# EAGLE board Qwiic_VEML7700-Panel (EAGLE 9.6.2), part 1 of 3
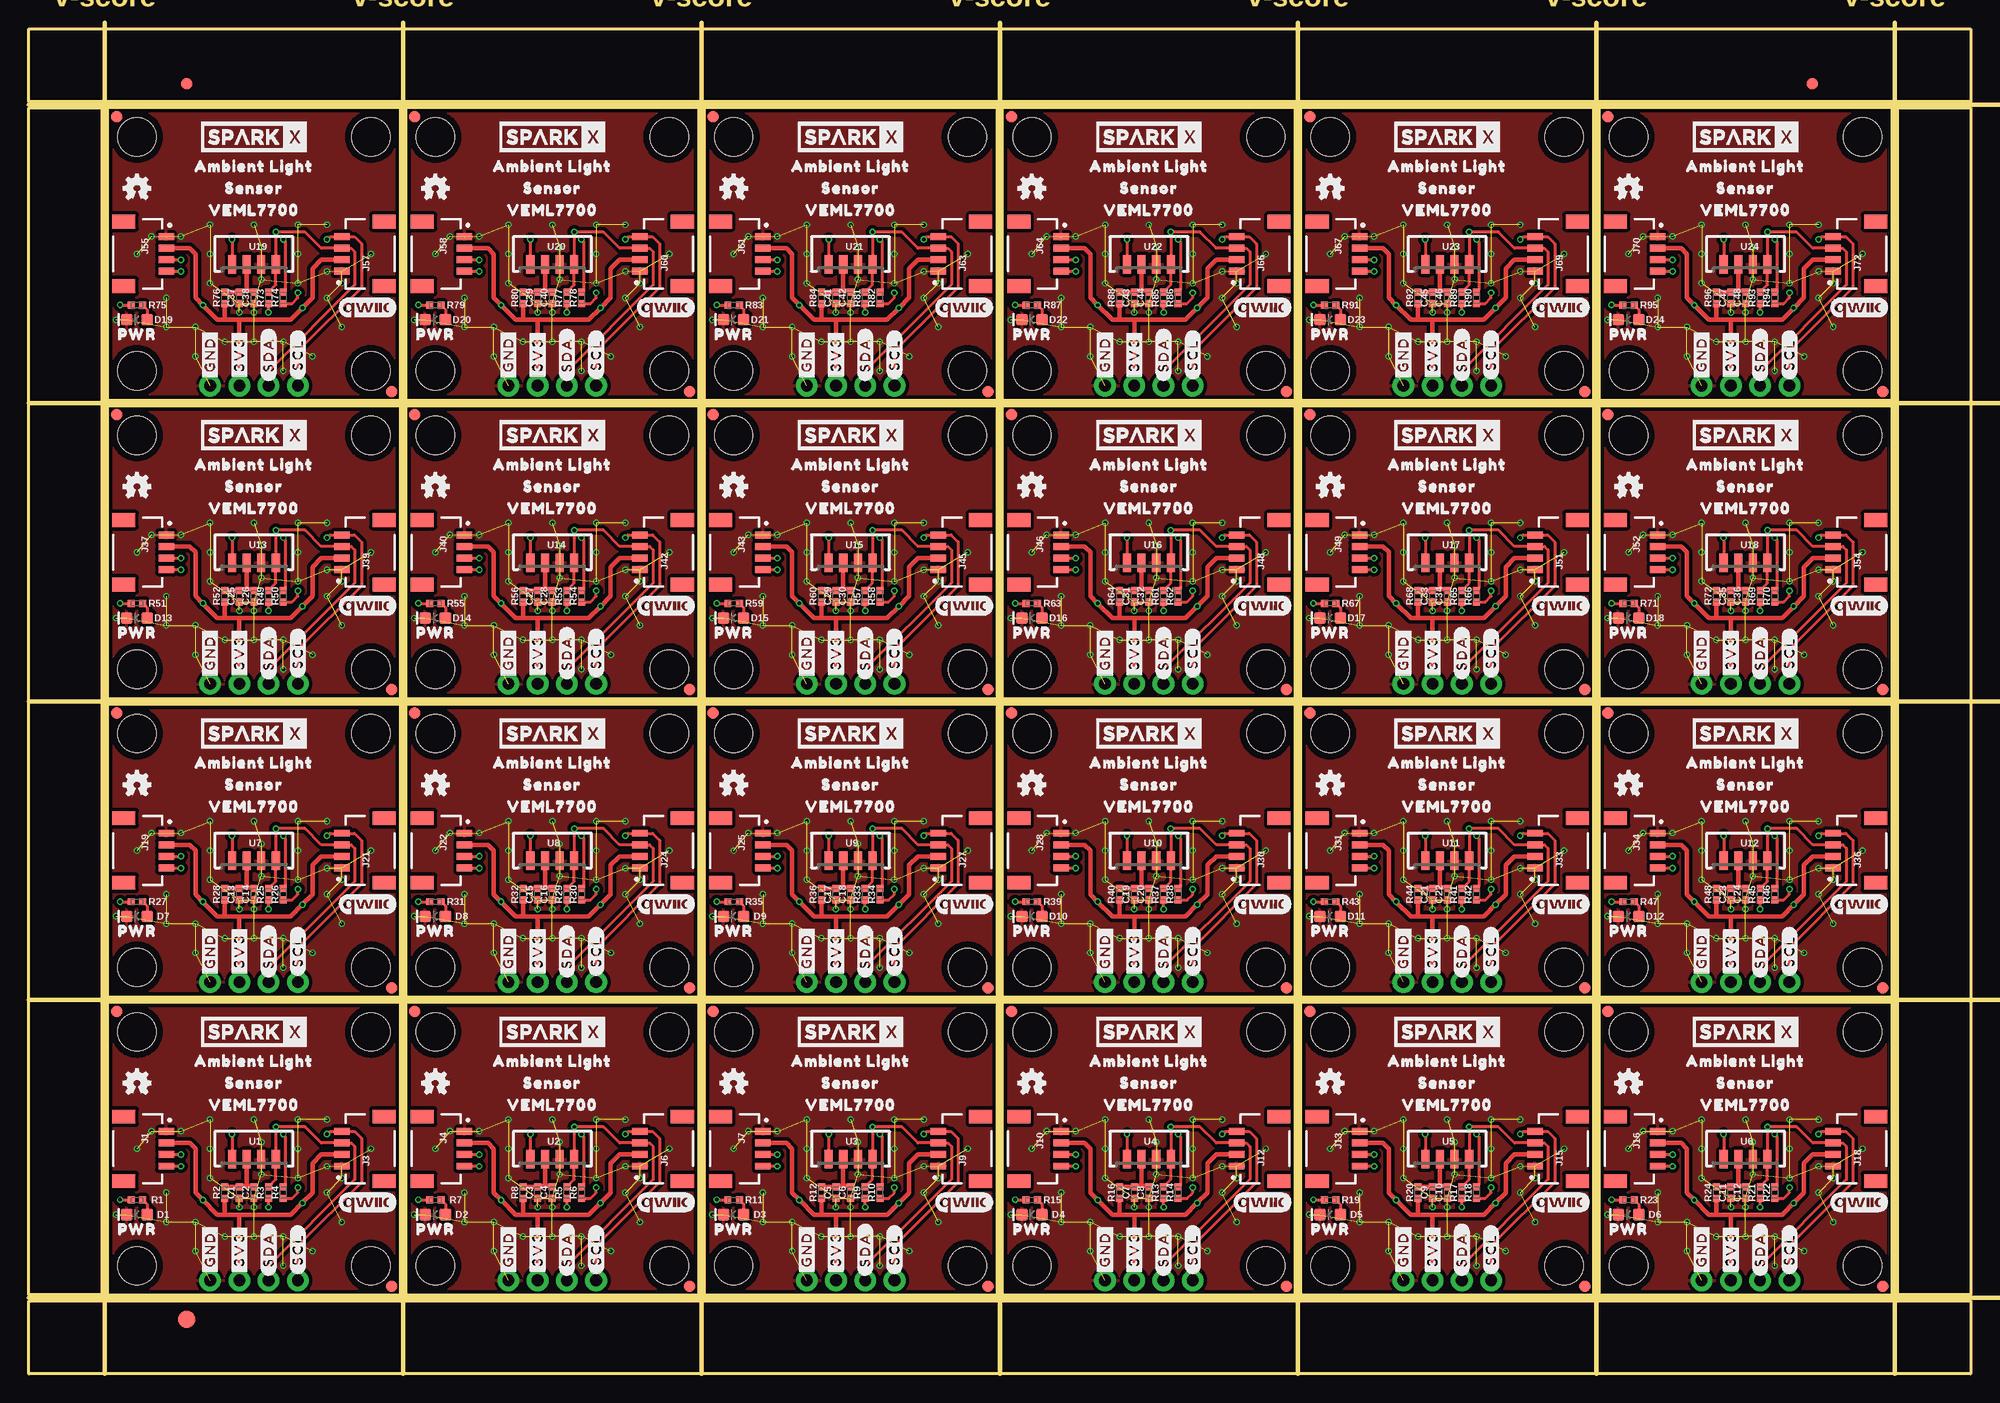
[diagram p0: board, top side]
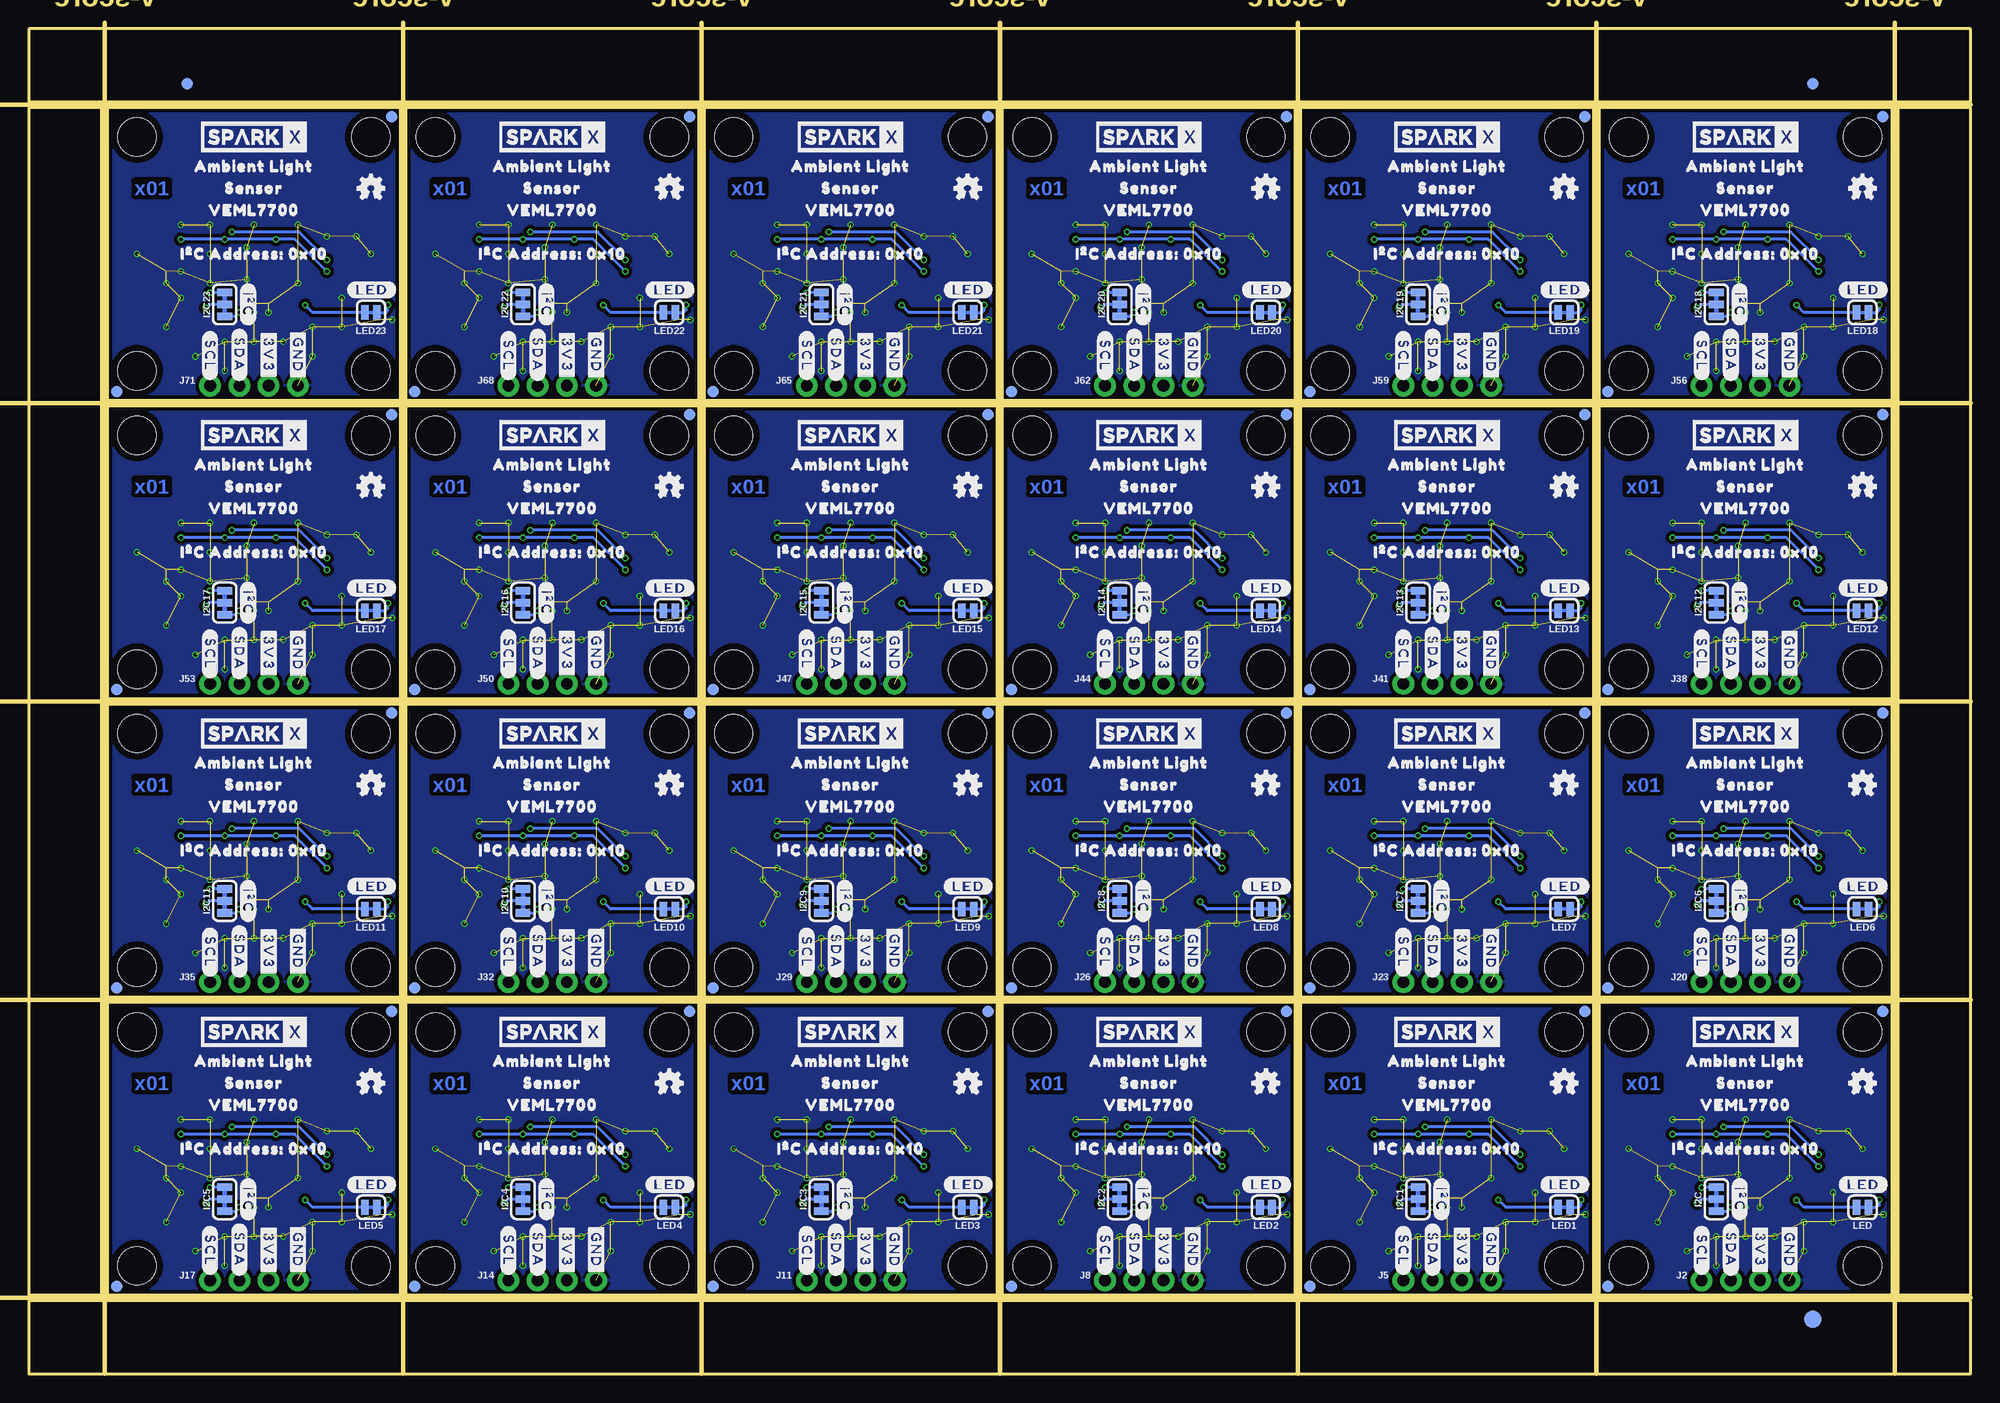
[diagram p1: board, bottom side, seen from below]

Size 168.66 x 116.84 mm. Coordinates in mm from the lower left corner, seen from the top.
Outline: 6.86,6.86 6.86,32.26 32.26,32.26 32.26,6.86 6.86,6.86
Outline: 32.77,6.86 32.77,32.26 58.17,32.26 58.17,6.86 32.77,6.86
Outline: 58.67,6.86 58.67,32.26 84.07,32.26 84.07,6.86 58.67,6.86
Outline: 84.58,6.86 84.58,32.26 109.98,32.26 109.98,6.86 84.58,6.86
Outline: 110.49,6.86 110.49,32.26 135.89,32.26 135.89,6.86 110.49,6.86
Outline: 136.4,6.86 136.4,32.26 161.8,32.26 161.8,6.86 136.4,6.86
Outline: 6.86,32.77 6.86,58.17 32.26,58.17 32.26,32.77 6.86,32.77
Outline: 32.77,32.77 32.77,58.17 58.17,58.17 58.17,32.77 32.77,32.77
Outline: 58.67,32.77 58.67,58.17 84.07,58.17 84.07,32.77 58.67,32.77
Outline: 84.58,32.77 84.58,58.17 109.98,58.17 109.98,32.77 84.58,32.77
Outline: 110.49,32.77 110.49,58.17 135.89,58.17 135.89,32.77 110.49,32.77
Outline: 136.4,32.77 136.4,58.17 161.8,58.17 161.8,32.77 136.4,32.77
Outline: 6.86,58.67 6.86,84.07 32.26,84.07 32.26,58.67 6.86,58.67
Outline: 32.77,58.67 32.77,84.07 58.17,84.07 58.17,58.67 32.77,58.67
Outline: 58.67,58.67 58.67,84.07 84.07,84.07 84.07,58.67 58.67,58.67
Outline: 84.58,58.67 84.58,84.07 109.98,84.07 109.98,58.67 84.58,58.67
Outline: 110.49,58.67 110.49,84.07 135.89,84.07 135.89,58.67 110.49,58.67
Outline: 136.4,58.67 136.4,84.07 161.8,84.07 161.8,58.67 136.4,58.67
Outline: 6.86,84.58 6.86,109.98 32.26,109.98 32.26,84.58 6.86,84.58
Outline: 32.77,84.58 32.77,109.98 58.17,109.98 58.17,84.58 32.77,84.58
Outline: 58.67,84.58 58.67,109.98 84.07,109.98 84.07,84.58 58.67,84.58
Outline: 84.58,84.58 84.58,109.98 109.98,109.98 109.98,84.58 84.58,84.58
Outline: 110.49,84.58 110.49,109.98 135.89,109.98 135.89,84.58 110.49,84.58
Outline: 136.4,84.58 136.4,109.98 161.8,109.98 161.8,84.58 136.4,84.58
Outline: 0,6.35 168.66,6.35 168.66,0 0,0 0,6.35
Outline: 162.31,109.98 168.66,109.98 168.66,6.86 162.31,6.86 162.31,109.98
Outline: 0,116.84 168.66,116.84 168.66,110.49 0,110.49 0,116.84
Outline: 0,109.98 6.35,109.98 6.35,6.86 0,6.86 0,109.98
Copper layers (1*16): Top 0.035mm / dielectric 1.5mm / Bottom 0.035mm
Design rules "Qwiic_VEML7700": minimum track width 5mil, minimum drill 0.3mm, track to track 5mil, track to pad 5mil, pad to pad 5mil, via to via 5mil, smd to smd 5mil, copper to edge 7mil, drill to drill 7mil, minimum pad ring 5mil, minimum via ring 5mil, stop-mask expansion 2.5mil, vias tented up to drill 25mil, thermal gap 10mil
Milling: 12 lines

## Footprints (pad centres in the part's own frame; a part is rotated, then mirrored left to right if it is on the bottom)
0402-TIGHT = smd 0.6 x 0.6: 1 -0.5,0; 2 0.5,0
LED-0603 = smd 1 x 1: A -0.877,0; C 0.877,0
FIDUCIAL-1X2 = smd 1 x 1: 1 0,0
FIDUCIAL-1.5X3 = smd 1.5 x 1.5: 1 0,0
SMT-JUMPER_3_2-NC_TRACE_SILK = smd 0.66 x 1.27: 1 -1.041,0; 2 0,0; 3 1.041,0
JST04_1MM_RA = smd 0.6 x 1.35: 1 -1.5,0; 2 -0.5,0; 3 0.5,0; 4 1.5,0 | smd 1.2 x 2: NC1 2.8,-3.675; NC2 -2.8,-3.675
1X04_NO_SILK = drill 1.016 pad 1.88: 1 0,0; 2 2.54,0; 3 5.08,0; 4 7.62,0
STAND-OFF = hole 3.302: 0,0
SMT-JUMPER_2_NC_TRACE_SILK = smd 0.66 x 1.27: 1 -0.521,0; 2 0.521,0
VEML7700_TT = smd 0.7 x 1.6: 1 -1.905,-0.9; 2 -0.635,-0.9; 3 0.635,-0.9; 4 1.905,-0.9

## Placement (x,y rotation side)
C1  2.2uF  [0402-TIGHT]  18.29,15.75 270 top
C2  0.1uF  [0402-TIGHT]  19.56,15.75 270 top
C3  2.2uF  [0402-TIGHT]  44.2,15.75 270 top
C4  0.1uF  [0402-TIGHT]  45.47,15.75 270 top
C5  2.2uF  [0402-TIGHT]  70.1,15.75 270 top
C6  0.1uF  [0402-TIGHT]  71.37,15.75 270 top
C7  2.2uF  [0402-TIGHT]  96.01,15.75 270 top
C8  0.1uF  [0402-TIGHT]  97.28,15.75 270 top
C9  2.2uF  [0402-TIGHT]  121.92,15.75 270 top
C10  0.1uF  [0402-TIGHT]  123.19,15.75 270 top
C11  2.2uF  [0402-TIGHT]  147.83,15.75 270 top
C12  0.1uF  [0402-TIGHT]  149.1,15.75 270 top
C13  2.2uF  [0402-TIGHT]  18.29,41.66 270 top
C14  0.1uF  [0402-TIGHT]  19.56,41.66 270 top
C15  2.2uF  [0402-TIGHT]  44.2,41.66 270 top
C16  0.1uF  [0402-TIGHT]  45.47,41.66 270 top
C17  2.2uF  [0402-TIGHT]  70.1,41.66 270 top
C18  0.1uF  [0402-TIGHT]  71.37,41.66 270 top
C19  2.2uF  [0402-TIGHT]  96.01,41.66 270 top
C20  0.1uF  [0402-TIGHT]  97.28,41.66 270 top
C21  2.2uF  [0402-TIGHT]  121.92,41.66 270 top
C22  0.1uF  [0402-TIGHT]  123.19,41.66 270 top
C23  2.2uF  [0402-TIGHT]  147.83,41.66 270 top
C24  0.1uF  [0402-TIGHT]  149.1,41.66 270 top
C25  2.2uF  [0402-TIGHT]  18.29,67.56 270 top
C26  0.1uF  [0402-TIGHT]  19.56,67.56 270 top
C27  2.2uF  [0402-TIGHT]  44.2,67.56 270 top
C28  0.1uF  [0402-TIGHT]  45.47,67.56 270 top
C29  2.2uF  [0402-TIGHT]  70.1,67.56 270 top
C30  0.1uF  [0402-TIGHT]  71.37,67.56 270 top
C31  2.2uF  [0402-TIGHT]  96.01,67.56 270 top
C32  0.1uF  [0402-TIGHT]  97.28,67.56 270 top
C33  2.2uF  [0402-TIGHT]  121.92,67.56 270 top
C34  0.1uF  [0402-TIGHT]  123.19,67.56 270 top
C35  2.2uF  [0402-TIGHT]  147.83,67.56 270 top
C36  0.1uF  [0402-TIGHT]  149.1,67.56 270 top
C37  2.2uF  [0402-TIGHT]  18.29,93.47 270 top
C38  0.1uF  [0402-TIGHT]  19.56,93.47 270 top
C39  2.2uF  [0402-TIGHT]  44.2,93.47 270 top
C40  0.1uF  [0402-TIGHT]  45.47,93.47 270 top
C41  2.2uF  [0402-TIGHT]  70.1,93.47 270 top
C42  0.1uF  [0402-TIGHT]  71.37,93.47 270 top
C43  2.2uF  [0402-TIGHT]  96.01,93.47 270 top
C44  0.1uF  [0402-TIGHT]  97.28,93.47 270 top
C45  2.2uF  [0402-TIGHT]  121.92,93.47 270 top
C46  0.1uF  [0402-TIGHT]  123.19,93.47 270 top
C47  2.2uF  [0402-TIGHT]  147.83,93.47 270 top
C48  0.1uF  [0402-TIGHT]  149.1,93.47 270 top
D1  RED  [LED-0603]  9.4,13.84 180 top
D2  RED  [LED-0603]  35.31,13.84 180 top
D3  RED  [LED-0603]  61.21,13.84 180 top
D4  RED  [LED-0603]  87.12,13.84 180 top
D5  RED  [LED-0603]  113.03,13.84 180 top
D6  RED  [LED-0603]  138.94,13.84 180 top
D7  RED  [LED-0603]  9.4,39.75 180 top
D8  RED  [LED-0603]  35.31,39.75 180 top
D9  RED  [LED-0603]  61.21,39.75 180 top
D10  RED  [LED-0603]  87.12,39.75 180 top
D11  RED  [LED-0603]  113.03,39.75 180 top
D12  RED  [LED-0603]  138.94,39.75 180 top
D13  RED  [LED-0603]  9.4,65.66 180 top
D14  RED  [LED-0603]  35.31,65.66 180 top
D15  RED  [LED-0603]  61.21,65.66 180 top
D16  RED  [LED-0603]  87.12,65.66 180 top
D17  RED  [LED-0603]  113.03,65.66 180 top
D18  RED  [LED-0603]  138.94,65.66 180 top
D19  RED  [LED-0603]  9.4,91.57 180 top
D20  RED  [LED-0603]  35.31,91.57 180 top
D21  RED  [LED-0603]  61.21,91.57 180 top
D22  RED  [LED-0603]  87.12,91.57 180 top
D23  RED  [LED-0603]  113.03,91.57 180 top
D24  RED  [LED-0603]  138.94,91.57 180 top
E$1  [FIDUCIAL-1X2]  13.72,112.08 0 top
E$2  [FIDUCIAL-1X2]  13.72,112.08 0 bottom
E$3  [FIDUCIAL-1X2]  154.88,112.08 0 top
E$4  [FIDUCIAL-1X2]  154.88,112.08 0 bottom
E$5  [FIDUCIAL-1.5X3]  13.72,4.76 0 top
E$6  [FIDUCIAL-1.5X3]  13.72,4.76 0 bottom
I2C  JUMPER-SMT_3_2-NC_TRACE_SILK  [SMT-JUMPER_3_2-NC_TRACE_SILK]  22.1,15.18 270 bottom
I2C1  JUMPER-SMT_3_2-NC_TRACE_SILK  [SMT-JUMPER_3_2-NC_TRACE_SILK]  48.01,15.18 270 bottom
I2C2  JUMPER-SMT_3_2-NC_TRACE_SILK  [SMT-JUMPER_3_2-NC_TRACE_SILK]  73.91,15.18 270 bottom
I2C3  JUMPER-SMT_3_2-NC_TRACE_SILK  [SMT-JUMPER_3_2-NC_TRACE_SILK]  99.82,15.18 270 bottom
I2C4  JUMPER-SMT_3_2-NC_TRACE_SILK  [SMT-JUMPER_3_2-NC_TRACE_SILK]  125.73,15.18 270 bottom
I2C5  JUMPER-SMT_3_2-NC_TRACE_SILK  [SMT-JUMPER_3_2-NC_TRACE_SILK]  151.64,15.18 270 bottom
I2C6  JUMPER-SMT_3_2-NC_TRACE_SILK  [SMT-JUMPER_3_2-NC_TRACE_SILK]  22.1,41.08 270 bottom
I2C7  JUMPER-SMT_3_2-NC_TRACE_SILK  [SMT-JUMPER_3_2-NC_TRACE_SILK]  48.01,41.08 270 bottom
I2C8  JUMPER-SMT_3_2-NC_TRACE_SILK  [SMT-JUMPER_3_2-NC_TRACE_SILK]  73.91,41.08 270 bottom
I2C9  JUMPER-SMT_3_2-NC_TRACE_SILK  [SMT-JUMPER_3_2-NC_TRACE_SILK]  99.82,41.08 270 bottom
I2C10  JUMPER-SMT_3_2-NC_TRACE_SILK  [SMT-JUMPER_3_2-NC_TRACE_SILK]  125.73,41.08 270 bottom
I2C11  JUMPER-SMT_3_2-NC_TRACE_SILK  [SMT-JUMPER_3_2-NC_TRACE_SILK]  151.64,41.08 270 bottom
I2C12  JUMPER-SMT_3_2-NC_TRACE_SILK  [SMT-JUMPER_3_2-NC_TRACE_SILK]  22.1,66.99 270 bottom
I2C13  JUMPER-SMT_3_2-NC_TRACE_SILK  [SMT-JUMPER_3_2-NC_TRACE_SILK]  48.01,66.99 270 bottom
I2C14  JUMPER-SMT_3_2-NC_TRACE_SILK  [SMT-JUMPER_3_2-NC_TRACE_SILK]  73.91,66.99 270 bottom
I2C15  JUMPER-SMT_3_2-NC_TRACE_SILK  [SMT-JUMPER_3_2-NC_TRACE_SILK]  99.82,66.99 270 bottom
I2C16  JUMPER-SMT_3_2-NC_TRACE_SILK  [SMT-JUMPER_3_2-NC_TRACE_SILK]  125.73,66.99 270 bottom
I2C17  JUMPER-SMT_3_2-NC_TRACE_SILK  [SMT-JUMPER_3_2-NC_TRACE_SILK]  151.64,66.99 270 bottom
I2C18  JUMPER-SMT_3_2-NC_TRACE_SILK  [SMT-JUMPER_3_2-NC_TRACE_SILK]  22.1,92.9 270 bottom
I2C19  JUMPER-SMT_3_2-NC_TRACE_SILK  [SMT-JUMPER_3_2-NC_TRACE_SILK]  48.01,92.9 270 bottom
I2C20  JUMPER-SMT_3_2-NC_TRACE_SILK  [SMT-JUMPER_3_2-NC_TRACE_SILK]  73.91,92.9 270 bottom
I2C21  JUMPER-SMT_3_2-NC_TRACE_SILK  [SMT-JUMPER_3_2-NC_TRACE_SILK]  99.82,92.9 270 bottom
I2C22  JUMPER-SMT_3_2-NC_TRACE_SILK  [SMT-JUMPER_3_2-NC_TRACE_SILK]  125.73,92.9 270 bottom
I2C23  JUMPER-SMT_3_2-NC_TRACE_SILK  [SMT-JUMPER_3_2-NC_TRACE_SILK]  151.64,92.9 270 bottom
J1  Qwiic Right Angle  [JST04_1MM_RA]  11.94,19.56 270 top
J2  PTH  [1X04_NO_SILK]  15.75,8.13 180 bottom
J3  Qwiic Right Angle  [JST04_1MM_RA]  27.18,19.56 90 top
J4  Qwiic Right Angle  [JST04_1MM_RA]  37.85,19.56 270 top
J5  PTH  [1X04_NO_SILK]  41.66,8.13 180 bottom
J6  Qwiic Right Angle  [JST04_1MM_RA]  53.09,19.56 90 top
J7  Qwiic Right Angle  [JST04_1MM_RA]  63.75,19.56 270 top
J8  PTH  [1X04_NO_SILK]  67.56,8.13 180 bottom
J9  Qwiic Right Angle  [JST04_1MM_RA]  78.99,19.56 90 top
J10  Qwiic Right Angle  [JST04_1MM_RA]  89.66,19.56 270 top
J11  PTH  [1X04_NO_SILK]  93.47,8.13 180 bottom
J12  Qwiic Right Angle  [JST04_1MM_RA]  104.9,19.56 90 top
J13  Qwiic Right Angle  [JST04_1MM_RA]  115.57,19.56 270 top
J14  PTH  [1X04_NO_SILK]  119.38,8.13 180 bottom
J15  Qwiic Right Angle  [JST04_1MM_RA]  130.81,19.56 90 top
J16  Qwiic Right Angle  [JST04_1MM_RA]  141.48,19.56 270 top
J17  PTH  [1X04_NO_SILK]  145.29,8.13 180 bottom
J18  Qwiic Right Angle  [JST04_1MM_RA]  156.72,19.56 90 top
J19  Qwiic Right Angle  [JST04_1MM_RA]  11.94,45.47 270 top
J20  PTH  [1X04_NO_SILK]  15.75,34.04 180 bottom
J21  Qwiic Right Angle  [JST04_1MM_RA]  27.18,45.47 90 top
J22  Qwiic Right Angle  [JST04_1MM_RA]  37.85,45.47 270 top
J23  PTH  [1X04_NO_SILK]  41.66,34.04 180 bottom
J24  Qwiic Right Angle  [JST04_1MM_RA]  53.09,45.47 90 top
J25  Qwiic Right Angle  [JST04_1MM_RA]  63.75,45.47 270 top
J26  PTH  [1X04_NO_SILK]  67.56,34.04 180 bottom
J27  Qwiic Right Angle  [JST04_1MM_RA]  78.99,45.47 90 top
J28  Qwiic Right Angle  [JST04_1MM_RA]  89.66,45.47 270 top
J29  PTH  [1X04_NO_SILK]  93.47,34.04 180 bottom
J30  Qwiic Right Angle  [JST04_1MM_RA]  104.9,45.47 90 top
J31  Qwiic Right Angle  [JST04_1MM_RA]  115.57,45.47 270 top
J32  PTH  [1X04_NO_SILK]  119.38,34.04 180 bottom
J33  Qwiic Right Angle  [JST04_1MM_RA]  130.81,45.47 90 top
J34  Qwiic Right Angle  [JST04_1MM_RA]  141.48,45.47 270 top
J35  PTH  [1X04_NO_SILK]  145.29,34.04 180 bottom
J36  Qwiic Right Angle  [JST04_1MM_RA]  156.72,45.47 90 top
J37  Qwiic Right Angle  [JST04_1MM_RA]  11.94,71.37 270 top
J38  PTH  [1X04_NO_SILK]  15.75,59.94 180 bottom
J39  Qwiic Right Angle  [JST04_1MM_RA]  27.18,71.37 90 top
J40  Qwiic Right Angle  [JST04_1MM_RA]  37.85,71.37 270 top
J41  PTH  [1X04_NO_SILK]  41.66,59.94 180 bottom
J42  Qwiic Right Angle  [JST04_1MM_RA]  53.09,71.37 90 top
J43  Qwiic Right Angle  [JST04_1MM_RA]  63.75,71.37 270 top
J44  PTH  [1X04_NO_SILK]  67.56,59.94 180 bottom
J45  Qwiic Right Angle  [JST04_1MM_RA]  78.99,71.37 90 top
J46  Qwiic Right Angle  [JST04_1MM_RA]  89.66,71.37 270 top
J47  PTH  [1X04_NO_SILK]  93.47,59.94 180 bottom
J48  Qwiic Right Angle  [JST04_1MM_RA]  104.9,71.37 90 top
J49  Qwiic Right Angle  [JST04_1MM_RA]  115.57,71.37 270 top
J50  PTH  [1X04_NO_SILK]  119.38,59.94 180 bottom
J51  Qwiic Right Angle  [JST04_1MM_RA]  130.81,71.37 90 top
J52  Qwiic Right Angle  [JST04_1MM_RA]  141.48,71.37 270 top
J53  PTH  [1X04_NO_SILK]  145.29,59.94 180 bottom
J54  Qwiic Right Angle  [JST04_1MM_RA]  156.72,71.37 90 top
J55  Qwiic Right Angle  [JST04_1MM_RA]  11.94,97.28 270 top
J56  PTH  [1X04_NO_SILK]  15.75,85.85 180 bottom
J57  Qwiic Right Angle  [JST04_1MM_RA]  27.18,97.28 90 top
J58  Qwiic Right Angle  [JST04_1MM_RA]  37.85,97.28 270 top
J59  PTH  [1X04_NO_SILK]  41.66,85.85 180 bottom
J60  Qwiic Right Angle  [JST04_1MM_RA]  53.09,97.28 90 top
J61  Qwiic Right Angle  [JST04_1MM_RA]  63.75,97.28 270 top
J62  PTH  [1X04_NO_SILK]  67.56,85.85 180 bottom
J63  Qwiic Right Angle  [JST04_1MM_RA]  78.99,97.28 90 top
J64  Qwiic Right Angle  [JST04_1MM_RA]  89.66,97.28 270 top
J65  PTH  [1X04_NO_SILK]  93.47,85.85 180 bottom
J66  Qwiic Right Angle  [JST04_1MM_RA]  104.9,97.28 90 top
J67  Qwiic Right Angle  [JST04_1MM_RA]  115.57,97.28 270 top
J68  PTH  [1X04_NO_SILK]  119.38,85.85 180 bottom
J69  Qwiic Right Angle  [JST04_1MM_RA]  130.81,97.28 90 top
J70  Qwiic Right Angle  [JST04_1MM_RA]  141.48,97.28 270 top
J71  PTH  [1X04_NO_SILK]  145.29,85.85 180 bottom
J72  Qwiic Right Angle  [JST04_1MM_RA]  156.72,97.28 90 top
JP1  FIDUCIAL1X2  [FIDUCIAL-1X2]  7.62,31.5 0 bottom
JP2  FIDUCIAL1X2  [FIDUCIAL-1X2]  31.5,7.62 0 top
JP3  STAND-OFF  [STAND-OFF]  9.4,29.72 0 top
JP4  STAND-OFF  [STAND-OFF]  29.72,29.72 0 top
JP5  FIDUCIAL1X2  [FIDUCIAL-1X2]  31.5,7.62 0 bottom
JP6  FIDUCIAL1X2  [FIDUCIAL-1X2]  7.62,31.5 0 top
JP7  STAND-OFF  [STAND-OFF]  29.72,9.4 0 top
JP8  STAND-OFF  [STAND-OFF]  9.4,9.4 0 top
JP9  STAND-OFF  [STAND-OFF]  35.31,29.72 0 top
JP10  STAND-OFF  [STAND-OFF]  55.63,29.72 0 top
JP11  FIDUCIAL1X2  [FIDUCIAL-1X2]  57.4,7.62 0 top
JP12  FIDUCIAL1X2  [FIDUCIAL-1X2]  33.53,31.5 0 top
JP13  FIDUCIAL1X2  [FIDUCIAL-1X2]  33.53,31.5 0 bottom
JP14  FIDUCIAL1X2  [FIDUCIAL-1X2]  57.4,7.62 0 bottom
JP15  STAND-OFF  [STAND-OFF]  55.63,9.4 0 top
JP16  STAND-OFF  [STAND-OFF]  35.31,9.4 0 top
JP17  STAND-OFF  [STAND-OFF]  61.21,29.72 0 top
JP18  STAND-OFF  [STAND-OFF]  81.53,29.72 0 top
JP19  FIDUCIAL1X2  [FIDUCIAL-1X2]  83.31,7.62 0 top
JP20  FIDUCIAL1X2  [FIDUCIAL-1X2]  59.44,31.5 0 top
JP21  FIDUCIAL1X2  [FIDUCIAL-1X2]  59.44,31.5 0 bottom
JP22  FIDUCIAL1X2  [FIDUCIAL-1X2]  83.31,7.62 0 bottom
JP23  STAND-OFF  [STAND-OFF]  81.53,9.4 0 top
JP24  STAND-OFF  [STAND-OFF]  61.21,9.4 0 top
JP25  STAND-OFF  [STAND-OFF]  87.12,29.72 0 top
JP26  STAND-OFF  [STAND-OFF]  107.44,29.72 0 top
JP27  FIDUCIAL1X2  [FIDUCIAL-1X2]  109.22,7.62 0 top
JP28  FIDUCIAL1X2  [FIDUCIAL-1X2]  85.34,31.5 0 top
JP29  FIDUCIAL1X2  [FIDUCIAL-1X2]  85.34,31.5 0 bottom
JP30  FIDUCIAL1X2  [FIDUCIAL-1X2]  109.22,7.62 0 bottom
JP31  STAND-OFF  [STAND-OFF]  107.44,9.4 0 top
JP32  STAND-OFF  [STAND-OFF]  87.12,9.4 0 top
JP33  STAND-OFF  [STAND-OFF]  113.03,29.72 0 top
JP34  STAND-OFF  [STAND-OFF]  133.35,29.72 0 top
JP35  FIDUCIAL1X2  [FIDUCIAL-1X2]  135.13,7.62 0 top
JP36  FIDUCIAL1X2  [FIDUCIAL-1X2]  111.25,31.5 0 top
JP37  FIDUCIAL1X2  [FIDUCIAL-1X2]  111.25,31.5 0 bottom
JP38  FIDUCIAL1X2  [FIDUCIAL-1X2]  135.13,7.62 0 bottom
JP39  STAND-OFF  [STAND-OFF]  133.35,9.4 0 top
JP40  STAND-OFF  [STAND-OFF]  113.03,9.4 0 top
JP41  STAND-OFF  [STAND-OFF]  138.94,29.72 0 top
JP42  STAND-OFF  [STAND-OFF]  159.26,29.72 0 top
JP43  FIDUCIAL1X2  [FIDUCIAL-1X2]  161.04,7.62 0 top
JP44  FIDUCIAL1X2  [FIDUCIAL-1X2]  137.16,31.5 0 top
JP45  FIDUCIAL1X2  [FIDUCIAL-1X2]  137.16,31.5 0 bottom
JP46  FIDUCIAL1X2  [FIDUCIAL-1X2]  161.04,7.62 0 bottom
JP47  STAND-OFF  [STAND-OFF]  159.26,9.4 0 top
JP48  STAND-OFF  [STAND-OFF]  138.94,9.4 0 top
JP49  STAND-OFF  [STAND-OFF]  9.4,55.63 0 top
JP50  STAND-OFF  [STAND-OFF]  29.72,55.63 0 top
JP51  FIDUCIAL1X2  [FIDUCIAL-1X2]  31.5,33.53 0 top
JP52  FIDUCIAL1X2  [FIDUCIAL-1X2]  7.62,57.4 0 top
JP53  FIDUCIAL1X2  [FIDUCIAL-1X2]  7.62,57.4 0 bottom
JP54  FIDUCIAL1X2  [FIDUCIAL-1X2]  31.5,33.53 0 bottom
JP55  STAND-OFF  [STAND-OFF]  29.72,35.31 0 top
JP56  STAND-OFF  [STAND-OFF]  9.4,35.31 0 top
JP57  STAND-OFF  [STAND-OFF]  35.31,55.63 0 top
JP58  STAND-OFF  [STAND-OFF]  55.63,55.63 0 top
JP59  FIDUCIAL1X2  [FIDUCIAL-1X2]  57.4,33.53 0 top
JP60  FIDUCIAL1X2  [FIDUCIAL-1X2]  33.53,57.4 0 top
JP61  FIDUCIAL1X2  [FIDUCIAL-1X2]  33.53,57.4 0 bottom
JP62  FIDUCIAL1X2  [FIDUCIAL-1X2]  57.4,33.53 0 bottom
JP63  STAND-OFF  [STAND-OFF]  55.63,35.31 0 top
JP64  STAND-OFF  [STAND-OFF]  35.31,35.31 0 top
JP65  STAND-OFF  [STAND-OFF]  61.21,55.63 0 top
JP66  STAND-OFF  [STAND-OFF]  81.53,55.63 0 top
JP67  FIDUCIAL1X2  [FIDUCIAL-1X2]  83.31,33.53 0 top
JP68  FIDUCIAL1X2  [FIDUCIAL-1X2]  59.44,57.4 0 top
JP69  FIDUCIAL1X2  [FIDUCIAL-1X2]  59.44,57.4 0 bottom
JP70  FIDUCIAL1X2  [FIDUCIAL-1X2]  83.31,33.53 0 bottom
JP71  STAND-OFF  [STAND-OFF]  81.53,35.31 0 top
JP72  STAND-OFF  [STAND-OFF]  61.21,35.31 0 top
JP73  STAND-OFF  [STAND-OFF]  87.12,55.63 0 top
JP74  STAND-OFF  [STAND-OFF]  107.44,55.63 0 top
JP75  FIDUCIAL1X2  [FIDUCIAL-1X2]  109.22,33.53 0 top
JP76  FIDUCIAL1X2  [FIDUCIAL-1X2]  85.34,57.4 0 top
JP77  FIDUCIAL1X2  [FIDUCIAL-1X2]  85.34,57.4 0 bottom
JP78  FIDUCIAL1X2  [FIDUCIAL-1X2]  109.22,33.53 0 bottom
JP79  STAND-OFF  [STAND-OFF]  107.44,35.31 0 top
JP80  STAND-OFF  [STAND-OFF]  87.12,35.31 0 top
JP81  STAND-OFF  [STAND-OFF]  113.03,55.63 0 top
JP82  STAND-OFF  [STAND-OFF]  133.35,55.63 0 top
JP83  FIDUCIAL1X2  [FIDUCIAL-1X2]  135.13,33.53 0 top
JP84  FIDUCIAL1X2  [FIDUCIAL-1X2]  111.25,57.4 0 top
JP85  FIDUCIAL1X2  [FIDUCIAL-1X2]  111.25,57.4 0 bottom
JP86  FIDUCIAL1X2  [FIDUCIAL-1X2]  135.13,33.53 0 bottom
JP87  STAND-OFF  [STAND-OFF]  133.35,35.31 0 top
JP88  STAND-OFF  [STAND-OFF]  113.03,35.31 0 top
JP89  STAND-OFF  [STAND-OFF]  138.94,55.63 0 top
JP90  STAND-OFF  [STAND-OFF]  159.26,55.63 0 top
JP91  FIDUCIAL1X2  [FIDUCIAL-1X2]  161.04,33.53 0 top
JP92  FIDUCIAL1X2  [FIDUCIAL-1X2]  137.16,57.4 0 top
JP93  FIDUCIAL1X2  [FIDUCIAL-1X2]  137.16,57.4 0 bottom
JP94  FIDUCIAL1X2  [FIDUCIAL-1X2]  161.04,33.53 0 bottom
JP95  STAND-OFF  [STAND-OFF]  159.26,35.31 0 top
JP96  STAND-OFF  [STAND-OFF]  138.94,35.31 0 top
JP97  STAND-OFF  [STAND-OFF]  9.4,81.53 0 top
JP98  STAND-OFF  [STAND-OFF]  29.72,81.53 0 top
JP99  FIDUCIAL1X2  [FIDUCIAL-1X2]  31.5,59.44 0 top
JP100  FIDUCIAL1X2  [FIDUCIAL-1X2]  7.62,83.31 0 top
JP101  FIDUCIAL1X2  [FIDUCIAL-1X2]  7.62,83.31 0 bottom
JP102  FIDUCIAL1X2  [FIDUCIAL-1X2]  31.5,59.44 0 bottom
JP103  STAND-OFF  [STAND-OFF]  29.72,61.21 0 top
JP104  STAND-OFF  [STAND-OFF]  9.4,61.21 0 top
JP105  STAND-OFF  [STAND-OFF]  35.31,81.53 0 top
JP106  STAND-OFF  [STAND-OFF]  55.63,81.53 0 top
JP107  FIDUCIAL1X2  [FIDUCIAL-1X2]  57.4,59.44 0 top
JP108  FIDUCIAL1X2  [FIDUCIAL-1X2]  33.53,83.31 0 top
JP109  FIDUCIAL1X2  [FIDUCIAL-1X2]  33.53,83.31 0 bottom
JP110  FIDUCIAL1X2  [FIDUCIAL-1X2]  57.4,59.44 0 bottom
JP111  STAND-OFF  [STAND-OFF]  55.63,61.21 0 top
JP112  STAND-OFF  [STAND-OFF]  35.31,61.21 0 top
JP113  STAND-OFF  [STAND-OFF]  61.21,81.53 0 top
JP114  STAND-OFF  [STAND-OFF]  81.53,81.53 0 top
JP115  FIDUCIAL1X2  [FIDUCIAL-1X2]  83.31,59.44 0 top
JP116  FIDUCIAL1X2  [FIDUCIAL-1X2]  59.44,83.31 0 top
JP117  FIDUCIAL1X2  [FIDUCIAL-1X2]  59.44,83.31 0 bottom
JP118  FIDUCIAL1X2  [FIDUCIAL-1X2]  83.31,59.44 0 bottom
JP119  STAND-OFF  [STAND-OFF]  81.53,61.21 0 top
JP120  STAND-OFF  [STAND-OFF]  61.21,61.21 0 top
JP121  STAND-OFF  [STAND-OFF]  87.12,81.53 0 top
JP122  STAND-OFF  [STAND-OFF]  107.44,81.53 0 top
JP123  FIDUCIAL1X2  [FIDUCIAL-1X2]  109.22,59.44 0 top
JP124  FIDUCIAL1X2  [FIDUCIAL-1X2]  85.34,83.31 0 top
JP125  FIDUCIAL1X2  [FIDUCIAL-1X2]  85.34,83.31 0 bottom
JP126  FIDUCIAL1X2  [FIDUCIAL-1X2]  109.22,59.44 0 bottom
JP127  STAND-OFF  [STAND-OFF]  107.44,61.21 0 top
JP128  STAND-OFF  [STAND-OFF]  87.12,61.21 0 top
JP129  STAND-OFF  [STAND-OFF]  113.03,81.53 0 top
JP130  STAND-OFF  [STAND-OFF]  133.35,81.53 0 top
JP131  FIDUCIAL1X2  [FIDUCIAL-1X2]  135.13,59.44 0 top
JP132  FIDUCIAL1X2  [FIDUCIAL-1X2]  111.25,83.31 0 top
JP133  FIDUCIAL1X2  [FIDUCIAL-1X2]  111.25,83.31 0 bottom
JP134  FIDUCIAL1X2  [FIDUCIAL-1X2]  135.13,59.44 0 bottom
JP135  STAND-OFF  [STAND-OFF]  133.35,61.21 0 top
JP136  STAND-OFF  [STAND-OFF]  113.03,61.21 0 top
JP137  STAND-OFF  [STAND-OFF]  138.94,81.53 0 top
JP138  STAND-OFF  [STAND-OFF]  159.26,81.53 0 top
JP139  FIDUCIAL1X2  [FIDUCIAL-1X2]  161.04,59.44 0 top
JP140  FIDUCIAL1X2  [FIDUCIAL-1X2]  137.16,83.31 0 top
JP141  FIDUCIAL1X2  [FIDUCIAL-1X2]  137.16,83.31 0 bottom
JP142  FIDUCIAL1X2  [FIDUCIAL-1X2]  161.04,59.44 0 bottom
JP143  STAND-OFF  [STAND-OFF]  159.26,61.21 0 top
JP144  STAND-OFF  [STAND-OFF]  138.94,61.21 0 top
JP145  STAND-OFF  [STAND-OFF]  9.4,107.44 0 top
JP146  STAND-OFF  [STAND-OFF]  29.72,107.44 0 top
JP147  FIDUCIAL1X2  [FIDUCIAL-1X2]  31.5,85.34 0 top
JP148  FIDUCIAL1X2  [FIDUCIAL-1X2]  7.62,109.22 0 top
JP149  FIDUCIAL1X2  [FIDUCIAL-1X2]  7.62,109.22 0 bottom
JP150  FIDUCIAL1X2  [FIDUCIAL-1X2]  31.5,85.34 0 bottom
JP151  STAND-OFF  [STAND-OFF]  29.72,87.12 0 top
JP152  STAND-OFF  [STAND-OFF]  9.4,87.12 0 top
JP153  STAND-OFF  [STAND-OFF]  35.31,107.44 0 top
JP154  STAND-OFF  [STAND-OFF]  55.63,107.44 0 top
JP155  FIDUCIAL1X2  [FIDUCIAL-1X2]  57.4,85.34 0 top
JP156  FIDUCIAL1X2  [FIDUCIAL-1X2]  33.53,109.22 0 top
JP157  FIDUCIAL1X2  [FIDUCIAL-1X2]  33.53,109.22 0 bottom
JP158  FIDUCIAL1X2  [FIDUCIAL-1X2]  57.4,85.34 0 bottom
JP159  STAND-OFF  [STAND-OFF]  55.63,87.12 0 top
JP160  STAND-OFF  [STAND-OFF]  35.31,87.12 0 top
JP161  STAND-OFF  [STAND-OFF]  61.21,107.44 0 top
JP162  STAND-OFF  [STAND-OFF]  81.53,107.44 0 top
JP163  FIDUCIAL1X2  [FIDUCIAL-1X2]  83.31,85.34 0 top
JP164  FIDUCIAL1X2  [FIDUCIAL-1X2]  59.44,109.22 0 top
JP165  FIDUCIAL1X2  [FIDUCIAL-1X2]  59.44,109.22 0 bottom
JP166  FIDUCIAL1X2  [FIDUCIAL-1X2]  83.31,85.34 0 bottom
JP167  STAND-OFF  [STAND-OFF]  81.53,87.12 0 top
JP168  STAND-OFF  [STAND-OFF]  61.21,87.12 0 top
JP169  STAND-OFF  [STAND-OFF]  87.12,107.44 0 top
JP170  STAND-OFF  [STAND-OFF]  107.44,107.44 0 top
JP171  FIDUCIAL1X2  [FIDUCIAL-1X2]  109.22,85.34 0 top
JP172  FIDUCIAL1X2  [FIDUCIAL-1X2]  85.34,109.22 0 top
JP173  FIDUCIAL1X2  [FIDUCIAL-1X2]  85.34,109.22 0 bottom
JP174  FIDUCIAL1X2  [FIDUCIAL-1X2]  109.22,85.34 0 bottom
JP175  STAND-OFF  [STAND-OFF]  107.44,87.12 0 top
JP176  STAND-OFF  [STAND-OFF]  87.12,87.12 0 top
JP177  STAND-OFF  [STAND-OFF]  113.03,107.44 0 top
JP178  STAND-OFF  [STAND-OFF]  133.35,107.44 0 top
JP179  FIDUCIAL1X2  [FIDUCIAL-1X2]  135.13,85.34 0 top
JP180  FIDUCIAL1X2  [FIDUCIAL-1X2]  111.25,109.22 0 top
JP181  FIDUCIAL1X2  [FIDUCIAL-1X2]  111.25,109.22 0 bottom
JP182  FIDUCIAL1X2  [FIDUCIAL-1X2]  135.13,85.34 0 bottom
JP183  STAND-OFF  [STAND-OFF]  133.35,87.12 0 top
JP184  STAND-OFF  [STAND-OFF]  113.03,87.12 0 top
JP185  STAND-OFF  [STAND-OFF]  138.94,107.44 0 top
JP186  STAND-OFF  [STAND-OFF]  159.26,107.44 0 top
JP187  FIDUCIAL1X2  [FIDUCIAL-1X2]  161.04,85.34 0 top
JP188  FIDUCIAL1X2  [FIDUCIAL-1X2]  137.16,109.22 0 top
JP189  FIDUCIAL1X2  [FIDUCIAL-1X2]  137.16,109.22 0 bottom
JP190  FIDUCIAL1X2  [FIDUCIAL-1X2]  161.04,85.34 0 bottom
JP191  STAND-OFF  [STAND-OFF]  159.26,87.12 0 top
JP192  STAND-OFF  [STAND-OFF]  138.94,87.12 0 top
LED  [SMT-JUMPER_2_NC_TRACE_SILK]  9.4,14.48 180 bottom
LED1  [SMT-JUMPER_2_NC_TRACE_SILK]  35.31,14.48 180 bottom
LED2  [SMT-JUMPER_2_NC_TRACE_SILK]  61.21,14.48 180 bottom
LED3  [SMT-JUMPER_2_NC_TRACE_SILK]  87.12,14.48 180 bottom
LED4  [SMT-JUMPER_2_NC_TRACE_SILK]  113.03,14.48 180 bottom
LED5  [SMT-JUMPER_2_NC_TRACE_SILK]  138.94,14.48 180 bottom
LED6  [SMT-JUMPER_2_NC_TRACE_SILK]  9.4,40.39 180 bottom
LED7  [SMT-JUMPER_2_NC_TRACE_SILK]  35.31,40.39 180 bottom
LED8  [SMT-JUMPER_2_NC_TRACE_SILK]  61.21,40.39 180 bottom
LED9  [SMT-JUMPER_2_NC_TRACE_SILK]  87.12,40.39 180 bottom
LED10  [SMT-JUMPER_2_NC_TRACE_SILK]  113.03,40.39 180 bottom
LED11  [SMT-JUMPER_2_NC_TRACE_SILK]  138.94,40.39 180 bottom
LED12  [SMT-JUMPER_2_NC_TRACE_SILK]  9.4,66.29 180 bottom
LED13  [SMT-JUMPER_2_NC_TRACE_SILK]  35.31,66.29 180 bottom
LED14  [SMT-JUMPER_2_NC_TRACE_SILK]  61.21,66.29 180 bottom
LED15  [SMT-JUMPER_2_NC_TRACE_SILK]  87.12,66.29 180 bottom
LED16  [SMT-JUMPER_2_NC_TRACE_SILK]  113.03,66.29 180 bottom
LED17  [SMT-JUMPER_2_NC_TRACE_SILK]  138.94,66.29 180 bottom
LED18  [SMT-JUMPER_2_NC_TRACE_SILK]  9.4,92.2 180 bottom
LED19  [SMT-JUMPER_2_NC_TRACE_SILK]  35.31,92.2 180 bottom
LED20  [SMT-JUMPER_2_NC_TRACE_SILK]  61.21,92.2 180 bottom
LED21  [SMT-JUMPER_2_NC_TRACE_SILK]  87.12,92.2 180 bottom
LED22  [SMT-JUMPER_2_NC_TRACE_SILK]  113.03,92.2 180 bottom
LED23  [SMT-JUMPER_2_NC_TRACE_SILK]  138.94,92.2 180 bottom
LOGO1  OSHW-LOGOMINI  [OSHW-LOGO-MINI]  9.4,25.27 0 top
LOGO2  OSHW-LOGOMINI  [OSHW-LOGO-MINI]  35.31,25.27 0 top
LOGO3  QWIIC_LOGO_5MM  [QWIIC_5MM]  29.4,14.92 0 top
LOGO4  OSHW-LOGOMINI  [OSHW-LOGO-MINI]  9.4,25.27 0 bottom
LOGO5  QWIIC_LOGO_5MM  [QWIIC_5MM]  55.31,14.92 0 top
LOGO6  OSHW-LOGOMINI  [OSHW-LOGO-MINI]  35.31,25.27 0 bottom
LOGO7  OSHW-LOGOMINI  [OSHW-LOGO-MINI]  61.21,25.27 0 top
LOGO8  QWIIC_LOGO_5MM  [QWIIC_5MM]  81.22,14.92 0 top
LOGO9  OSHW-LOGOMINI  [OSHW-LOGO-MINI]  61.21,25.27 0 bottom
LOGO10  OSHW-LOGOMINI  [OSHW-LOGO-MINI]  87.12,25.27 0 top
LOGO11  QWIIC_LOGO_5MM  [QWIIC_5MM]  107.12,14.92 0 top
LOGO12  OSHW-LOGOMINI  [OSHW-LOGO-MINI]  87.12,25.27 0 bottom
LOGO13  OSHW-LOGOMINI  [OSHW-LOGO-MINI]  113.03,25.27 0 top
LOGO14  QWIIC_LOGO_5MM  [QWIIC_5MM]  133.03,14.92 0 top
LOGO15  OSHW-LOGOMINI  [OSHW-LOGO-MINI]  113.03,25.27 0 bottom
LOGO16  OSHW-LOGOMINI  [OSHW-LOGO-MINI]  138.94,25.27 0 top
LOGO17  QWIIC_LOGO_5MM  [QWIIC_5MM]  158.94,14.92 0 top
LOGO18  OSHW-LOGOMINI  [OSHW-LOGO-MINI]  138.94,25.27 0 bottom
LOGO19  OSHW-LOGOMINI  [OSHW-LOGO-MINI]  9.4,51.18 0 top
LOGO20  QWIIC_LOGO_5MM  [QWIIC_5MM]  29.4,40.83 0 top
LOGO21  OSHW-LOGOMINI  [OSHW-LOGO-MINI]  9.4,51.18 0 bottom
LOGO22  OSHW-LOGOMINI  [OSHW-LOGO-MINI]  35.31,51.18 0 top
LOGO23  QWIIC_LOGO_5MM  [QWIIC_5MM]  55.31,40.83 0 top
LOGO24  OSHW-LOGOMINI  [OSHW-LOGO-MINI]  35.31,51.18 0 bottom
LOGO25  OSHW-LOGOMINI  [OSHW-LOGO-MINI]  61.21,51.18 0 top
LOGO26  QWIIC_LOGO_5MM  [QWIIC_5MM]  81.22,40.83 0 top
LOGO27  OSHW-LOGOMINI  [OSHW-LOGO-MINI]  61.21,51.18 0 bottom
LOGO28  OSHW-LOGOMINI  [OSHW-LOGO-MINI]  87.12,51.18 0 top
LOGO29  QWIIC_LOGO_5MM  [QWIIC_5MM]  107.12,40.83 0 top
LOGO30  OSHW-LOGOMINI  [OSHW-LOGO-MINI]  87.12,51.18 0 bottom
LOGO31  OSHW-LOGOMINI  [OSHW-LOGO-MINI]  113.03,51.18 0 top
LOGO32  QWIIC_LOGO_5MM  [QWIIC_5MM]  133.03,40.83 0 top
LOGO33  OSHW-LOGOMINI  [OSHW-LOGO-MINI]  113.03,51.18 0 bottom
LOGO34  OSHW-LOGOMINI  [OSHW-LOGO-MINI]  138.94,51.18 0 top
LOGO35  QWIIC_LOGO_5MM  [QWIIC_5MM]  158.94,40.83 0 top
LOGO36  OSHW-LOGOMINI  [OSHW-LOGO-MINI]  138.94,51.18 0 bottom
LOGO37  OSHW-LOGOMINI  [OSHW-LOGO-MINI]  9.4,77.09 0 top
LOGO38  QWIIC_LOGO_5MM  [QWIIC_5MM]  29.4,66.74 0 top
LOGO39  OSHW-LOGOMINI  [OSHW-LOGO-MINI]  9.4,77.09 0 bottom
LOGO40  OSHW-LOGOMINI  [OSHW-LOGO-MINI]  35.31,77.09 0 top
LOGO41  QWIIC_LOGO_5MM  [QWIIC_5MM]  55.31,66.74 0 top
LOGO42  OSHW-LOGOMINI  [OSHW-LOGO-MINI]  35.31,77.09 0 bottom
LOGO43  OSHW-LOGOMINI  [OSHW-LOGO-MINI]  61.21,77.09 0 top
LOGO44  QWIIC_LOGO_5MM  [QWIIC_5MM]  81.22,66.74 0 top
LOGO45  OSHW-LOGOMINI  [OSHW-LOGO-MINI]  61.21,77.09 0 bottom
LOGO46  OSHW-LOGOMINI  [OSHW-LOGO-MINI]  87.12,77.09 0 top
LOGO47  QWIIC_LOGO_5MM  [QWIIC_5MM]  107.12,66.74 0 top
LOGO48  OSHW-LOGOMINI  [OSHW-LOGO-MINI]  87.12,77.09 0 bottom
LOGO49  OSHW-LOGOMINI  [OSHW-LOGO-MINI]  113.03,77.09 0 top
LOGO50  QWIIC_LOGO_5MM  [QWIIC_5MM]  133.03,66.74 0 top
LOGO51  OSHW-LOGOMINI  [OSHW-LOGO-MINI]  113.03,77.09 0 bottom
LOGO52  OSHW-LOGOMINI  [OSHW-LOGO-MINI]  138.94,77.09 0 top
LOGO53  QWIIC_LOGO_5MM  [QWIIC_5MM]  158.94,66.74 0 top
LOGO54  OSHW-LOGOMINI  [OSHW-LOGO-MINI]  138.94,77.09 0 bottom
LOGO55  OSHW-LOGOMINI  [OSHW-LOGO-MINI]  9.4,103 0 top
LOGO56  QWIIC_LOGO_5MM  [QWIIC_5MM]  29.4,92.65 0 top
LOGO57  OSHW-LOGOMINI  [OSHW-LOGO-MINI]  9.4,103 0 bottom
LOGO58  OSHW-LOGOMINI  [OSHW-LOGO-MINI]  35.31,103 0 top
LOGO59  QWIIC_LOGO_5MM  [QWIIC_5MM]  55.31,92.65 0 top
LOGO60  OSHW-LOGOMINI  [OSHW-LOGO-MINI]  35.31,103 0 bottom
LOGO61  OSHW-LOGOMINI  [OSHW-LOGO-MINI]  61.21,103 0 top
LOGO62  QWIIC_LOGO_5MM  [QWIIC_5MM]  81.22,92.65 0 top
LOGO63  OSHW-LOGOMINI  [OSHW-LOGO-MINI]  61.21,103 0 bottom
LOGO64  OSHW-LOGOMINI  [OSHW-LOGO-MINI]  87.12,103 0 top
LOGO65  QWIIC_LOGO_5MM  [QWIIC_5MM]  107.12,92.65 0 top
LOGO66  OSHW-LOGOMINI  [OSHW-LOGO-MINI]  87.12,103 0 bottom
LOGO67  OSHW-LOGOMINI  [OSHW-LOGO-MINI]  113.03,103 0 top
LOGO68  QWIIC_LOGO_5MM  [QWIIC_5MM]  133.03,92.65 0 top
LOGO69  OSHW-LOGOMINI  [OSHW-LOGO-MINI]  113.03,103 0 bottom
LOGO70  OSHW-LOGOMINI  [OSHW-LOGO-MINI]  138.94,103 0 top
LOGO71  QWIIC_LOGO_5MM  [QWIIC_5MM]  158.94,92.65 0 top
LOGO72  OSHW-LOGOMINI  [OSHW-LOGO-MINI]  138.94,103 0 bottom
R1  1k  [0402-TIGHT]  9.4,15.11 180 top
R2  4.7  [0402-TIGHT]  17.02,15.75 270 top
R3  4.7k  [0402-TIGHT]  20.83,15.75 270 top
R4  4.7k  [0402-TIGHT]  22.1,15.75 270 top
R5  4.7k  [0402-TIGHT]  46.74,15.75 270 top
R6  4.7k  [0402-TIGHT]  48.01,15.75 270 top
R7  1k  [0402-TIGHT]  35.31,15.11 180 top
R8  4.7  [0402-TIGHT]  42.93,15.75 270 top
R9  4.7k  [0402-TIGHT]  72.64,15.75 270 top
R10  4.7k  [0402-TIGHT]  73.91,15.75 270 top
R11  1k  [0402-TIGHT]  61.21,15.11 180 top
R12  4.7  [0402-TIGHT]  68.83,15.75 270 top
R13  4.7k  [0402-TIGHT]  98.55,15.75 270 top
R14  4.7k  [0402-TIGHT]  99.82,15.75 270 top
R15  1k  [0402-TIGHT]  87.12,15.11 180 top
R16  4.7  [0402-TIGHT]  94.74,15.75 270 top
R17  4.7k  [0402-TIGHT]  124.46,15.75 270 top
R18  4.7k  [0402-TIGHT]  125.73,15.75 270 top
R19  1k  [0402-TIGHT]  113.03,15.11 180 top
R20  4.7  [0402-TIGHT]  120.65,15.75 270 top
R21  4.7k  [0402-TIGHT]  150.37,15.75 270 top
R22  4.7k  [0402-TIGHT]  151.64,15.75 270 top
R23  1k  [0402-TIGHT]  138.94,15.11 180 top
R24  4.7  [0402-TIGHT]  146.56,15.75 270 top
R25  4.7k  [0402-TIGHT]  20.83,41.66 270 top
R26  4.7k  [0402-TIGHT]  22.1,41.66 270 top
R27  1k  [0402-TIGHT]  9.4,41.02 180 top
R28  4.7  [0402-TIGHT]  17.02,41.66 270 top
R29  4.7k  [0402-TIGHT]  46.74,41.66 270 top
R30  4.7k  [0402-TIGHT]  48.01,41.66 270 top
R31  1k  [0402-TIGHT]  35.31,41.02 180 top
R32  4.7  [0402-TIGHT]  42.93,41.66 270 top
R33  4.7k  [0402-TIGHT]  72.64,41.66 270 top
R34  4.7k  [0402-TIGHT]  73.91,41.66 270 top
R35  1k  [0402-TIGHT]  61.21,41.02 180 top
R36  4.7  [0402-TIGHT]  68.83,41.66 270 top
R37  4.7k  [0402-TIGHT]  98.55,41.66 270 top
R38  4.7k  [0402-TIGHT]  99.82,41.66 270 top
R39  1k  [0402-TIGHT]  87.12,41.02 180 top
R40  4.7  [0402-TIGHT]  94.74,41.66 270 top
R41  4.7k  [0402-TIGHT]  124.46,41.66 270 top
R42  4.7k  [0402-TIGHT]  125.73,41.66 270 top
R43  1k  [0402-TIGHT]  113.03,41.02 180 top
R44  4.7  [0402-TIGHT]  120.65,41.66 270 top
R45  4.7k  [0402-TIGHT]  150.37,41.66 270 top
R46  4.7k  [0402-TIGHT]  151.64,41.66 270 top
R47  1k  [0402-TIGHT]  138.94,41.02 180 top
R48  4.7  [0402-TIGHT]  146.56,41.66 270 top
R49  4.7k  [0402-TIGHT]  20.83,67.56 270 top
R50  4.7k  [0402-TIGHT]  22.1,67.56 270 top
R51  1k  [0402-TIGHT]  9.4,66.93 180 top
R52  4.7  [0402-TIGHT]  17.02,67.56 270 top
R53  4.7k  [0402-TIGHT]  46.74,67.56 270 top
R54  4.7k  [0402-TIGHT]  48.01,67.56 270 top
R55  1k  [0402-TIGHT]  35.31,66.93 180 top
R56  4.7  [0402-TIGHT]  42.93,67.56 270 top
R57  4.7k  [0402-TIGHT]  72.64,67.56 270 top
R58  4.7k  [0402-TIGHT]  73.91,67.56 270 top
R59  1k  [0402-TIGHT]  61.21,66.93 180 top
R60  4.7  [0402-TIGHT]  68.83,67.56 270 top
R61  4.7k  [0402-TIGHT]  98.55,67.56 270 top
R62  4.7k  [0402-TIGHT]  99.82,67.56 270 top
R63  1k  [0402-TIGHT]  87.12,66.93 180 top
R64  4.7  [0402-TIGHT]  94.74,67.56 270 top
R65  4.7k  [0402-TIGHT]  124.46,67.56 270 top
R66  4.7k  [0402-TIGHT]  125.73,67.56 270 top
R67  1k  [0402-TIGHT]  113.03,66.93 180 top
R68  4.7  [0402-TIGHT]  120.65,67.56 270 top
R69  4.7k  [0402-TIGHT]  150.37,67.56 270 top
R70  4.7k  [0402-TIGHT]  151.64,67.56 270 top
R71  1k  [0402-TIGHT]  138.94,66.93 180 top
R72  4.7  [0402-TIGHT]  146.56,67.56 270 top
R73  4.7k  [0402-TIGHT]  20.83,93.47 270 top
R74  4.7k  [0402-TIGHT]  22.1,93.47 270 top
R75  1k  [0402-TIGHT]  9.4,92.84 180 top
R76  4.7  [0402-TIGHT]  17.02,93.47 270 top
R77  4.7k  [0402-TIGHT]  46.74,93.47 270 top
R78  4.7k  [0402-TIGHT]  48.01,93.47 270 top
R79  1k  [0402-TIGHT]  35.31,92.84 180 top
R80  4.7  [0402-TIGHT]  42.93,93.47 270 top
R81  4.7k  [0402-TIGHT]  72.64,93.47 270 top
R82  4.7k  [0402-TIGHT]  73.91,93.47 270 top
R83  1k  [0402-TIGHT]  61.21,92.84 180 top
R84  4.7  [0402-TIGHT]  68.83,93.47 270 top
R85  4.7k  [0402-TIGHT]  98.55,93.47 270 top
R86  4.7k  [0402-TIGHT]  99.82,93.47 270 top
R87  1k  [0402-TIGHT]  87.12,92.84 180 top
R88  4.7  [0402-TIGHT]  94.74,93.47 270 top
R89  4.7k  [0402-TIGHT]  124.46,93.47 270 top
R90  4.7k  [0402-TIGHT]  125.73,93.47 270 top
R91  1k  [0402-TIGHT]  113.03,92.84 180 top
R92  4.7  [0402-TIGHT]  120.65,93.47 270 top
R93  4.7k  [0402-TIGHT]  150.37,93.47 270 top
R94  4.7k  [0402-TIGHT]  151.64,93.47 270 top
R95  1k  [0402-TIGHT]  138.94,92.84 180 top
R96  4.7  [0402-TIGHT]  146.56,93.47 270 top
U1  VEML7700-TT  [VEML7700_TT]  19.56,19.56 0 top
U2  VEML7700-TT  [VEML7700_TT]  45.47,19.56 0 top
U3  VEML7700-TT  [VEML7700_TT]  71.37,19.56 0 top
U4  VEML7700-TT  [VEML7700_TT]  97.28,19.56 0 top
U5  VEML7700-TT  [VEML7700_TT]  123.19,19.56 0 top
U6  VEML7700-TT  [VEML7700_TT]  149.1,19.56 0 top
U7  VEML7700-TT  [VEML7700_TT]  19.56,45.47 0 top
U8  VEML7700-TT  [VEML7700_TT]  45.47,45.47 0 top
U9  VEML7700-TT  [VEML7700_TT]  71.37,45.47 0 top
U10  VEML7700-TT  [VEML7700_TT]  97.28,45.47 0 top
U11  VEML7700-TT  [VEML7700_TT]  123.19,45.47 0 top
U12  VEML7700-TT  [VEML7700_TT]  149.1,45.47 0 top
U13  VEML7700-TT  [VEML7700_TT]  19.56,71.37 0 top
U14  VEML7700-TT  [VEML7700_TT]  45.47,71.37 0 top
U15  VEML7700-TT  [VEML7700_TT]  71.37,71.37 0 top
U16  VEML7700-TT  [VEML7700_TT]  97.28,71.37 0 top
U17  VEML7700-TT  [VEML7700_TT]  123.19,71.37 0 top
U18  VEML7700-TT  [VEML7700_TT]  149.1,71.37 0 top
U19  VEML7700-TT  [VEML7700_TT]  19.56,97.28 0 top
U20  VEML7700-TT  [VEML7700_TT]  45.47,97.28 0 top
U21  VEML7700-TT  [VEML7700_TT]  71.37,97.28 0 top
U22  VEML7700-TT  [VEML7700_TT]  97.28,97.28 0 top
U23  VEML7700-TT  [VEML7700_TT]  123.19,97.28 0 top
U24  VEML7700-TT  [VEML7700_TT]  149.1,97.28 0 top
U$1  [#3V3#0]  18.29,10.79 90 top
U$2  SPARKX-LOGO4  [SPARKX-MEDIUM]  19.56,29.72 0 bottom
U$3  [#3V3#0]  18.29,10.79 270 bottom
U$4  [#GND#0]  15.75,10.79 90 top
U$5  [#GND#0]  15.75,10.79 270 bottom
U$6  [#SDA#0]  20.83,10.79 90 top
U$7  [#SDA#0]  20.83,10.79 270 bottom
U$8  [#SCL#0]  23.37,10.79 90 top
U$9  [#SCL#0]  23.37,10.73 270 bottom
U$10  [PWR0]  9.4,12.57 0 top
U$11  [AMBIENT_LIGHT0]  19.56,27.18 0 top
U$12  [AMBIENT_LIGHT0]  19.56,27.18 0 bottom
U$13  [SENSOR0]  19.56,25.27 0 top
U$14  [SENSOR0]  19.56,25.27 0 bottom
U$15  [VEML77000]  19.56,23.37 0 top
U$16  [VEML77000]  19.56,23.37 0 bottom
U$17  [#I�C#0]  20.07,15.18 270 bottom
U$18  [I�C_ADDRESS#_0X100]  19.56,19.56 0 bottom
U$19  [#LED#0]  9.33,16.45 0 bottom
U$20  SPARKX-LOGO4  [SPARKX-MEDIUM]  45.47,29.72 0 bottom
U$21  SPARKX-LOGO4  [SPARKX-MEDIUM]  19.56,29.72 0 top
U$22  SPARKX-LOGO4  [SPARKX-MEDIUM]  45.47,29.72 0 top
U$23  [#3V3#0]  44.2,10.79 90 top
U$24  [#3V3#0]  44.2,10.79 270 bottom
U$25  [#GND#0]  41.66,10.79 90 top
U$26  [#GND#0]  41.66,10.79 270 bottom
U$27  [#SDA#0]  46.74,10.79 90 top
U$28  [#SDA#0]  46.74,10.79 270 bottom
U$29  [#SCL#0]  49.28,10.79 90 top
U$30  [#SCL#0]  49.28,10.73 270 bottom
U$31  [PWR0]  35.31,12.57 0 top
U$32  [AMBIENT_LIGHT0]  45.47,27.18 0 top
U$33  [AMBIENT_LIGHT0]  45.47,27.18 0 bottom
U$34  [SENSOR0]  45.47,25.27 0 top
U$35  [SENSOR0]  45.47,25.27 0 bottom
U$36  [VEML77000]  45.47,23.37 0 top
U$37  [VEML77000]  45.47,23.37 0 bottom
U$38  [#I�C#0]  45.97,15.18 270 bottom
U$39  [I�C_ADDRESS#_0X100]  45.47,19.56 0 bottom
U$40  [#LED#0]  35.24,16.45 0 bottom
U$41  SPARKX-LOGO4  [SPARKX-MEDIUM]  71.37,29.72 0 bottom
U$42  SPARKX-LOGO4  [SPARKX-MEDIUM]  71.37,29.72 0 top
U$43  [#3V3#0]  70.1,10.79 90 top
U$44  [#3V3#0]  70.1,10.79 270 bottom
U$45  [#GND#0]  67.56,10.79 90 top
U$46  [#GND#0]  67.56,10.79 270 bottom
U$47  [#SDA#0]  72.64,10.79 90 top
U$48  [#SDA#0]  72.64,10.79 270 bottom
U$49  [#SCL#0]  75.18,10.79 90 top
U$50  [#SCL#0]  75.18,10.73 270 bottom
U$51  [PWR0]  61.21,12.57 0 top
U$52  [AMBIENT_LIGHT0]  71.37,27.18 0 top
U$53  [AMBIENT_LIGHT0]  71.37,27.18 0 bottom
U$54  [SENSOR0]  71.37,25.27 0 top
U$55  [SENSOR0]  71.37,25.27 0 bottom
U$56  [VEML77000]  71.37,23.37 0 top
U$57  [VEML77000]  71.37,23.37 0 bottom
U$58  [#I�C#0]  71.88,15.18 270 bottom
U$59  [I�C_ADDRESS#_0X100]  71.37,19.56 0 bottom
U$60  [#LED#0]  61.15,16.45 0 bottom
U$61  SPARKX-LOGO4  [SPARKX-MEDIUM]  97.28,29.72 0 bottom
U$62  SPARKX-LOGO4  [SPARKX-MEDIUM]  97.28,29.72 0 top
U$63  [#3V3#0]  96.01,10.79 90 top
U$64  [#3V3#0]  96.01,10.79 270 bottom
U$65  [#GND#0]  93.47,10.79 90 top
U$66  [#GND#0]  93.47,10.79 270 bottom
U$67  [#SDA#0]  98.55,10.79 90 top
U$68  [#SDA#0]  98.55,10.79 270 bottom
U$69  [#SCL#0]  101.09,10.79 90 top
U$70  [#SCL#0]  101.09,10.73 270 bottom
U$71  [PWR0]  87.12,12.57 0 top
U$72  [AMBIENT_LIGHT0]  97.28,27.18 0 top
U$73  [AMBIENT_LIGHT0]  97.28,27.18 0 bottom
U$74  [SENSOR0]  97.28,25.27 0 top
U$75  [SENSOR0]  97.28,25.27 0 bottom
U$76  [VEML77000]  97.28,23.37 0 top
U$77  [VEML77000]  97.28,23.37 0 bottom
U$78  [#I�C#0]  97.79,15.18 270 bottom
U$79  [I�C_ADDRESS#_0X100]  97.28,19.56 0 bottom
U$80  [#LED#0]  87.06,16.45 0 bottom
U$81  SPARKX-LOGO4  [SPARKX-MEDIUM]  123.19,29.72 0 bottom
U$82  SPARKX-LOGO4  [SPARKX-MEDIUM]  123.19,29.72 0 top
U$83  [#3V3#0]  121.92,10.79 90 top
U$84  [#3V3#0]  121.92,10.79 270 bottom
U$85  [#GND#0]  119.38,10.79 90 top
U$86  [#GND#0]  119.38,10.79 270 bottom
U$87  [#SDA#0]  124.46,10.79 90 top
U$88  [#SDA#0]  124.46,10.79 270 bottom
U$89  [#SCL#0]  127,10.79 90 top
U$90  [#SCL#0]  127,10.73 270 bottom
U$91  [PWR0]  113.03,12.57 0 top
U$92  [AMBIENT_LIGHT0]  123.19,27.18 0 top
U$93  [AMBIENT_LIGHT0]  123.19,27.18 0 bottom
U$94  [SENSOR0]  123.19,25.27 0 top
U$95  [SENSOR0]  123.19,25.27 0 bottom
U$96  [VEML77000]  123.19,23.37 0 top
U$97  [VEML77000]  123.19,23.37 0 bottom
U$98  [#I�C#0]  123.7,15.18 270 bottom
U$99  [I�C_ADDRESS#_0X100]  123.19,19.56 0 bottom
U$100  [#LED#0]  112.97,16.45 0 bottom
U$101  SPARKX-LOGO4  [SPARKX-MEDIUM]  149.1,29.72 0 bottom
U$102  SPARKX-LOGO4  [SPARKX-MEDIUM]  149.1,29.72 0 top
U$103  [#3V3#0]  147.83,10.79 90 top
U$104  [#3V3#0]  147.83,10.79 270 bottom
U$105  [#GND#0]  145.29,10.79 90 top
U$106  [#GND#0]  145.29,10.79 270 bottom
U$107  [#SDA#0]  150.37,10.79 90 top
U$108  [#SDA#0]  150.37,10.79 270 bottom
U$109  [#SCL#0]  152.91,10.79 90 top
U$110  [#SCL#0]  152.91,10.73 270 bottom
U$111  [PWR0]  138.94,12.57 0 top
U$112  [AMBIENT_LIGHT0]  149.1,27.18 0 top
U$113  [AMBIENT_LIGHT0]  149.1,27.18 0 bottom
U$114  [SENSOR0]  149.1,25.27 0 top
U$115  [SENSOR0]  149.1,25.27 0 bottom
U$116  [VEML77000]  149.1,23.37 0 top
U$117  [VEML77000]  149.1,23.37 0 bottom
U$118  [#I�C#0]  149.61,15.18 270 bottom
U$119  [I�C_ADDRESS#_0X100]  149.1,19.56 0 bottom
U$120  [#LED#0]  138.87,16.45 0 bottom
U$121  SPARKX-LOGO4  [SPARKX-MEDIUM]  19.56,55.63 0 bottom
U$122  SPARKX-LOGO4  [SPARKX-MEDIUM]  19.56,55.63 0 top
U$123  [#3V3#0]  18.29,36.7 90 top
U$124  [#3V3#0]  18.29,36.7 270 bottom
U$125  [#GND#0]  15.75,36.7 90 top
U$126  [#GND#0]  15.75,36.7 270 bottom
U$127  [#SDA#0]  20.83,36.7 90 top
U$128  [#SDA#0]  20.83,36.7 270 bottom
U$129  [#SCL#0]  23.37,36.7 90 top
U$130  [#SCL#0]  23.37,36.64 270 bottom
U$131  [PWR0]  9.4,38.48 0 top
U$132  [AMBIENT_LIGHT0]  19.56,53.09 0 top
U$133  [AMBIENT_LIGHT0]  19.56,53.09 0 bottom
U$134  [SENSOR0]  19.56,51.18 0 top
U$135  [SENSOR0]  19.56,51.18 0 bottom
U$136  [VEML77000]  19.56,49.28 0 top
U$137  [VEML77000]  19.56,49.28 0 bottom
U$138  [#I�C#0]  20.07,41.08 270 bottom
U$139  [I�C_ADDRESS#_0X100]  19.56,45.47 0 bottom
U$140  [#LED#0]  9.33,42.35 0 bottom
U$141  SPARKX-LOGO4  [SPARKX-MEDIUM]  45.47,55.63 0 bottom
U$142  SPARKX-LOGO4  [SPARKX-MEDIUM]  45.47,55.63 0 top
U$143  [#3V3#0]  44.2,36.7 90 top
U$144  [#3V3#0]  44.2,36.7 270 bottom
U$145  [#GND#0]  41.66,36.7 90 top
U$146  [#GND#0]  41.66,36.7 270 bottom
U$147  [#SDA#0]  46.74,36.7 90 top
U$148  [#SDA#0]  46.74,36.7 270 bottom
U$149  [#SCL#0]  49.28,36.7 90 top
U$150  [#SCL#0]  49.28,36.64 270 bottom
U$151  [PWR0]  35.31,38.48 0 top
U$152  [AMBIENT_LIGHT0]  45.47,53.09 0 top
U$153  [AMBIENT_LIGHT0]  45.47,53.09 0 bottom
U$154  [SENSOR0]  45.47,51.18 0 top
U$155  [SENSOR0]  45.47,51.18 0 bottom
U$156  [VEML77000]  45.47,49.28 0 top
U$157  [VEML77000]  45.47,49.28 0 bottom
U$158  [#I�C#0]  45.97,41.08 270 bottom
U$159  [I�C_ADDRESS#_0X100]  45.47,45.47 0 bottom
U$160  [#LED#0]  35.24,42.35 0 bottom
U$161  SPARKX-LOGO4  [SPARKX-MEDIUM]  71.37,55.63 0 bottom
U$162  SPARKX-LOGO4  [SPARKX-MEDIUM]  71.37,55.63 0 top
U$163  [#3V3#0]  70.1,36.7 90 top
U$164  [#3V3#0]  70.1,36.7 270 bottom
U$165  [#GND#0]  67.56,36.7 90 top
U$166  [#GND#0]  67.56,36.7 270 bottom
U$167  [#SDA#0]  72.64,36.7 90 top
U$168  [#SDA#0]  72.64,36.7 270 bottom
U$169  [#SCL#0]  75.18,36.7 90 top
U$170  [#SCL#0]  75.18,36.64 270 bottom
U$171  [PWR0]  61.21,38.48 0 top
U$172  [AMBIENT_LIGHT0]  71.37,53.09 0 top
U$173  [AMBIENT_LIGHT0]  71.37,53.09 0 bottom
U$174  [SENSOR0]  71.37,51.18 0 top
U$175  [SENSOR0]  71.37,51.18 0 bottom
U$176  [VEML77000]  71.37,49.28 0 top
U$177  [VEML77000]  71.37,49.28 0 bottom
U$178  [#I�C#0]  71.88,41.08 270 bottom
U$179  [I�C_ADDRESS#_0X100]  71.37,45.47 0 bottom
U$180  [#LED#0]  61.15,42.35 0 bottom
U$181  SPARKX-LOGO4  [SPARKX-MEDIUM]  97.28,55.63 0 bottom
U$182  SPARKX-LOGO4  [SPARKX-MEDIUM]  97.28,55.63 0 top
U$183  [#3V3#0]  96.01,36.7 90 top
U$184  [#3V3#0]  96.01,36.7 270 bottom
U$185  [#GND#0]  93.47,36.7 90 top
U$186  [#GND#0]  93.47,36.7 270 bottom
U$187  [#SDA#0]  98.55,36.7 90 top
U$188  [#SDA#0]  98.55,36.7 270 bottom
U$189  [#SCL#0]  101.09,36.7 90 top
U$190  [#SCL#0]  101.09,36.64 270 bottom
U$191  [PWR0]  87.12,38.48 0 top
U$192  [AMBIENT_LIGHT0]  97.28,53.09 0 top
U$193  [AMBIENT_LIGHT0]  97.28,53.09 0 bottom
U$194  [SENSOR0]  97.28,51.18 0 top
U$195  [SENSOR0]  97.28,51.18 0 bottom
U$196  [VEML77000]  97.28,49.28 0 top
U$197  [VEML77000]  97.28,49.28 0 bottom
U$198  [#I�C#0]  97.79,41.08 270 bottom
U$199  [I�C_ADDRESS#_0X100]  97.28,45.47 0 bottom
U$200  [#LED#0]  87.06,42.35 0 bottom
U$201  SPARKX-LOGO4  [SPARKX-MEDIUM]  123.19,55.63 0 bottom
U$202  SPARKX-LOGO4  [SPARKX-MEDIUM]  123.19,55.63 0 top
U$203  [#3V3#0]  121.92,36.7 90 top
U$204  [#3V3#0]  121.92,36.7 270 bottom
U$205  [#GND#0]  119.38,36.7 90 top
U$206  [#GND#0]  119.38,36.7 270 bottom
U$207  [#SDA#0]  124.46,36.7 90 top
U$208  [#SDA#0]  124.46,36.7 270 bottom
U$209  [#SCL#0]  127,36.7 90 top
U$210  [#SCL#0]  127,36.64 270 bottom
U$211  [PWR0]  113.03,38.48 0 top
U$212  [AMBIENT_LIGHT0]  123.19,53.09 0 top
U$213  [AMBIENT_LIGHT0]  123.19,53.09 0 bottom
U$214  [SENSOR0]  123.19,51.18 0 top
U$215  [SENSOR0]  123.19,51.18 0 bottom
U$216  [VEML77000]  123.19,49.28 0 top
U$217  [VEML77000]  123.19,49.28 0 bottom
U$218  [#I�C#0]  123.7,41.08 270 bottom
U$219  [I�C_ADDRESS#_0X100]  123.19,45.47 0 bottom
U$220  [#LED#0]  112.97,42.35 0 bottom
U$221  SPARKX-LOGO4  [SPARKX-MEDIUM]  149.1,55.63 0 bottom
U$222  SPARKX-LOGO4  [SPARKX-MEDIUM]  149.1,55.63 0 top
U$223  [#3V3#0]  147.83,36.7 90 top
U$224  [#3V3#0]  147.83,36.7 270 bottom
U$225  [#GND#0]  145.29,36.7 90 top
U$226  [#GND#0]  145.29,36.7 270 bottom
U$227  [#SDA#0]  150.37,36.7 90 top
U$228  [#SDA#0]  150.37,36.7 270 bottom
U$229  [#SCL#0]  152.91,36.7 90 top
U$230  [#SCL#0]  152.91,36.64 270 bottom
U$231  [PWR0]  138.94,38.48 0 top
U$232  [AMBIENT_LIGHT0]  149.1,53.09 0 top
U$233  [AMBIENT_LIGHT0]  149.1,53.09 0 bottom
U$234  [SENSOR0]  149.1,51.18 0 top
U$235  [SENSOR0]  149.1,51.18 0 bottom
U$236  [VEML77000]  149.1,49.28 0 top
U$237  [VEML77000]  149.1,49.28 0 bottom
U$238  [#I�C#0]  149.61,41.08 270 bottom
U$239  [I�C_ADDRESS#_0X100]  149.1,45.47 0 bottom
U$240  [#LED#0]  138.87,42.35 0 bottom
U$241  SPARKX-LOGO4  [SPARKX-MEDIUM]  19.56,81.53 0 bottom
U$242  SPARKX-LOGO4  [SPARKX-MEDIUM]  19.56,81.53 0 top
U$243  [#3V3#0]  18.29,62.61 90 top
U$244  [#3V3#0]  18.29,62.61 270 bottom
U$245  [#GND#0]  15.75,62.61 90 top
U$246  [#GND#0]  15.75,62.61 270 bottom
U$247  [#SDA#0]  20.83,62.61 90 top
U$248  [#SDA#0]  20.83,62.61 270 bottom
U$249  [#SCL#0]  23.37,62.61 90 top
U$250  [#SCL#0]  23.37,62.55 270 bottom
U$251  [PWR0]  9.4,64.39 0 top
U$252  [AMBIENT_LIGHT0]  19.56,78.99 0 top
U$253  [AMBIENT_LIGHT0]  19.56,78.99 0 bottom
U$254  [SENSOR0]  19.56,77.09 0 top
U$255  [SENSOR0]  19.56,77.09 0 bottom
U$256  [VEML77000]  19.56,75.18 0 top
U$257  [VEML77000]  19.56,75.18 0 bottom
U$258  [#I�C#0]  20.07,66.99 270 bottom
U$259  [I�C_ADDRESS#_0X100]  19.56,71.37 0 bottom
U$260  [#LED#0]  9.33,68.26 0 bottom
U$261  SPARKX-LOGO4  [SPARKX-MEDIUM]  45.47,81.53 0 bottom
U$262  SPARKX-LOGO4  [SPARKX-MEDIUM]  45.47,81.53 0 top
U$263  [#3V3#0]  44.2,62.61 90 top
U$264  [#3V3#0]  44.2,62.61 270 bottom
U$265  [#GND#0]  41.66,62.61 90 top
U$266  [#GND#0]  41.66,62.61 270 bottom
U$267  [#SDA#0]  46.74,62.61 90 top
U$268  [#SDA#0]  46.74,62.61 270 bottom
U$269  [#SCL#0]  49.28,62.61 90 top
U$270  [#SCL#0]  49.28,62.55 270 bottom
U$271  [PWR0]  35.31,64.39 0 top
U$272  [AMBIENT_LIGHT0]  45.47,78.99 0 top
U$273  [AMBIENT_LIGHT0]  45.47,78.99 0 bottom
U$274  [SENSOR0]  45.47,77.09 0 top
U$275  [SENSOR0]  45.47,77.09 0 bottom
U$276  [VEML77000]  45.47,75.18 0 top
U$277  [VEML77000]  45.47,75.18 0 bottom
U$278  [#I�C#0]  45.97,66.99 270 bottom
U$279  [I�C_ADDRESS#_0X100]  45.47,71.37 0 bottom
U$280  [#LED#0]  35.24,68.26 0 bottom
U$281  SPARKX-LOGO4  [SPARKX-MEDIUM]  71.37,81.53 0 bottom
U$282  SPARKX-LOGO4  [SPARKX-MEDIUM]  71.37,81.53 0 top
U$283  [#3V3#0]  70.1,62.61 90 top
U$284  [#3V3#0]  70.1,62.61 270 bottom
U$285  [#GND#0]  67.56,62.61 90 top
U$286  [#GND#0]  67.56,62.61 270 bottom
U$287  [#SDA#0]  72.64,62.61 90 top
U$288  [#SDA#0]  72.64,62.61 270 bottom
U$289  [#SCL#0]  75.18,62.61 90 top
U$290  [#SCL#0]  75.18,62.55 270 bottom
U$291  [PWR0]  61.21,64.39 0 top
U$292  [AMBIENT_LIGHT0]  71.37,78.99 0 top
U$293  [AMBIENT_LIGHT0]  71.37,78.99 0 bottom
U$294  [SENSOR0]  71.37,77.09 0 top
U$295  [SENSOR0]  71.37,77.09 0 bottom
U$296  [VEML77000]  71.37,75.18 0 top
U$297  [VEML77000]  71.37,75.18 0 bottom
U$298  [#I�C#0]  71.88,66.99 270 bottom
U$299  [I�C_ADDRESS#_0X100]  71.37,71.37 0 bottom
U$300  [#LED#0]  61.15,68.26 0 bottom
U$301  SPARKX-LOGO4  [SPARKX-MEDIUM]  97.28,81.53 0 bottom
U$302  SPARKX-LOGO4  [SPARKX-MEDIUM]  97.28,81.53 0 top
U$303  [#3V3#0]  96.01,62.61 90 top
U$304  [#3V3#0]  96.01,62.61 270 bottom
U$305  [#GND#0]  93.47,62.61 90 top
U$306  [#GND#0]  93.47,62.61 270 bottom
U$307  [#SDA#0]  98.55,62.61 90 top
U$308  [#SDA#0]  98.55,62.61 270 bottom
U$309  [#SCL#0]  101.09,62.61 90 top
U$310  [#SCL#0]  101.09,62.55 270 bottom
U$311  [PWR0]  87.12,64.39 0 top
U$312  [AMBIENT_LIGHT0]  97.28,78.99 0 top
U$313  [AMBIENT_LIGHT0]  97.28,78.99 0 bottom
U$314  [SENSOR0]  97.28,77.09 0 top
U$315  [SENSOR0]  97.28,77.09 0 bottom
U$316  [VEML77000]  97.28,75.18 0 top
U$317  [VEML77000]  97.28,75.18 0 bottom
U$318  [#I�C#0]  97.79,66.99 270 bottom
U$319  [I�C_ADDRESS#_0X100]  97.28,71.37 0 bottom
U$320  [#LED#0]  87.06,68.26 0 bottom
U$321  SPARKX-LOGO4  [SPARKX-MEDIUM]  123.19,81.53 0 bottom
U$322  SPARKX-LOGO4  [SPARKX-MEDIUM]  123.19,81.53 0 top
U$323  [#3V3#0]  121.92,62.61 90 top
U$324  [#3V3#0]  121.92,62.61 270 bottom
U$325  [#GND#0]  119.38,62.61 90 top
U$326  [#GND#0]  119.38,62.61 270 bottom
U$327  [#SDA#0]  124.46,62.61 90 top
U$328  [#SDA#0]  124.46,62.61 270 bottom
U$329  [#SCL#0]  127,62.61 90 top
U$330  [#SCL#0]  127,62.55 270 bottom
U$331  [PWR0]  113.03,64.39 0 top
U$332  [AMBIENT_LIGHT0]  123.19,78.99 0 top
U$333  [AMBIENT_LIGHT0]  123.19,78.99 0 bottom
U$334  [SENSOR0]  123.19,77.09 0 top
U$335  [SENSOR0]  123.19,77.09 0 bottom
U$336  [VEML77000]  123.19,75.18 0 top
U$337  [VEML77000]  123.19,75.18 0 bottom
U$338  [#I�C#0]  123.7,66.99 270 bottom
U$339  [I�C_ADDRESS#_0X100]  123.19,71.37 0 bottom
U$340  [#LED#0]  112.97,68.26 0 bottom
U$341  SPARKX-LOGO4  [SPARKX-MEDIUM]  149.1,81.53 0 bottom
U$342  SPARKX-LOGO4  [SPARKX-MEDIUM]  149.1,81.53 0 top
U$343  [#3V3#0]  147.83,62.61 90 top
U$344  [#3V3#0]  147.83,62.61 270 bottom
U$345  [#GND#0]  145.29,62.61 90 top
U$346  [#GND#0]  145.29,62.61 270 bottom
U$347  [#SDA#0]  150.37,62.61 90 top
U$348  [#SDA#0]  150.37,62.61 270 bottom
U$349  [#SCL#0]  152.91,62.61 90 top
U$350  [#SCL#0]  152.91,62.55 270 bottom
U$351  [PWR0]  138.94,64.39 0 top
U$352  [AMBIENT_LIGHT0]  149.1,78.99 0 top
U$353  [AMBIENT_LIGHT0]  149.1,78.99 0 bottom
U$354  [SENSOR0]  149.1,77.09 0 top
U$355  [SENSOR0]  149.1,77.09 0 bottom
U$356  [VEML77000]  149.1,75.18 0 top
U$357  [VEML77000]  149.1,75.18 0 bottom
U$358  [#I�C#0]  149.61,66.99 270 bottom
U$359  [I�C_ADDRESS#_0X100]  149.1,71.37 0 bottom
U$360  [#LED#0]  138.87,68.26 0 bottom
U$361  SPARKX-LOGO4  [SPARKX-MEDIUM]  19.56,107.44 0 bottom
U$362  SPARKX-LOGO4  [SPARKX-MEDIUM]  19.56,107.44 0 top
U$363  [#3V3#0]  18.29,88.52 90 top
U$364  [#3V3#0]  18.29,88.52 270 bottom
U$365  [#GND#0]  15.75,88.52 90 top
U$366  [#GND#0]  15.75,88.52 270 bottom
U$367  [#SDA#0]  20.83,88.52 90 top
U$368  [#SDA#0]  20.83,88.52 270 bottom
U$369  [#SCL#0]  23.37,88.52 90 top
U$370  [#SCL#0]  23.37,88.46 270 bottom
U$371  [PWR0]  9.4,90.3 0 top
U$372  [AMBIENT_LIGHT0]  19.56,104.9 0 top
U$373  [AMBIENT_LIGHT0]  19.56,104.9 0 bottom
U$374  [SENSOR0]  19.56,103 0 top
U$375  [SENSOR0]  19.56,103 0 bottom
U$376  [VEML77000]  19.56,101.09 0 top
U$377  [VEML77000]  19.56,101.09 0 bottom
U$378  [#I�C#0]  20.07,92.9 270 bottom
U$379  [I�C_ADDRESS#_0X100]  19.56,97.28 0 bottom
U$380  [#LED#0]  9.33,94.17 0 bottom
U$381  SPARKX-LOGO4  [SPARKX-MEDIUM]  45.47,107.44 0 bottom
U$382  SPARKX-LOGO4  [SPARKX-MEDIUM]  45.47,107.44 0 top
U$383  [#3V3#0]  44.2,88.52 90 top
U$384  [#3V3#0]  44.2,88.52 270 bottom
U$385  [#GND#0]  41.66,88.52 90 top
U$386  [#GND#0]  41.66,88.52 270 bottom
U$387  [#SDA#0]  46.74,88.52 90 top
U$388  [#SDA#0]  46.74,88.52 270 bottom
U$389  [#SCL#0]  49.28,88.52 90 top
U$390  [#SCL#0]  49.28,88.46 270 bottom
U$391  [PWR0]  35.31,90.3 0 top
U$392  [AMBIENT_LIGHT0]  45.47,104.9 0 top
U$393  [AMBIENT_LIGHT0]  45.47,104.9 0 bottom
U$394  [SENSOR0]  45.47,103 0 top
U$395  [SENSOR0]  45.47,103 0 bottom
U$396  [VEML77000]  45.47,101.09 0 top
U$397  [VEML77000]  45.47,101.09 0 bottom
U$398  [#I�C#0]  45.97,92.9 270 bottom
U$399  [I�C_ADDRESS#_0X100]  45.47,97.28 0 bottom
U$400  [#LED#0]  35.24,94.17 0 bottom
U$401  SPARKX-LOGO4  [SPARKX-MEDIUM]  71.37,107.44 0 bottom
U$402  SPARKX-LOGO4  [SPARKX-MEDIUM]  71.37,107.44 0 top
U$403  [#3V3#0]  70.1,88.52 90 top
U$404  [#3V3#0]  70.1,88.52 270 bottom
U$405  [#GND#0]  67.56,88.52 90 top
U$406  [#GND#0]  67.56,88.52 270 bottom
U$407  [#SDA#0]  72.64,88.52 90 top
U$408  [#SDA#0]  72.64,88.52 270 bottom
U$409  [#SCL#0]  75.18,88.52 90 top
U$410  [#SCL#0]  75.18,88.46 270 bottom
U$411  [PWR0]  61.21,90.3 0 top
U$412  [AMBIENT_LIGHT0]  71.37,104.9 0 top
U$413  [AMBIENT_LIGHT0]  71.37,104.9 0 bottom
U$414  [SENSOR0]  71.37,103 0 top
U$415  [SENSOR0]  71.37,103 0 bottom
U$416  [VEML77000]  71.37,101.09 0 top
U$417  [VEML77000]  71.37,101.09 0 bottom
U$418  [#I�C#0]  71.88,92.9 270 bottom
U$419  [I�C_ADDRESS#_0X100]  71.37,97.28 0 bottom
U$420  [#LED#0]  61.15,94.17 0 bottom
U$421  SPARKX-LOGO4  [SPARKX-MEDIUM]  97.28,107.44 0 bottom
U$422  SPARKX-LOGO4  [SPARKX-MEDIUM]  97.28,107.44 0 top
U$423  [#3V3#0]  96.01,88.52 90 top
U$424  [#3V3#0]  96.01,88.52 270 bottom
U$425  [#GND#0]  93.47,88.52 90 top
U$426  [#GND#0]  93.47,88.52 270 bottom
U$427  [#SDA#0]  98.55,88.52 90 top
U$428  [#SDA#0]  98.55,88.52 270 bottom
U$429  [#SCL#0]  101.09,88.52 90 top
U$430  [#SCL#0]  101.09,88.46 270 bottom